# Allegro board XS6-8.brd
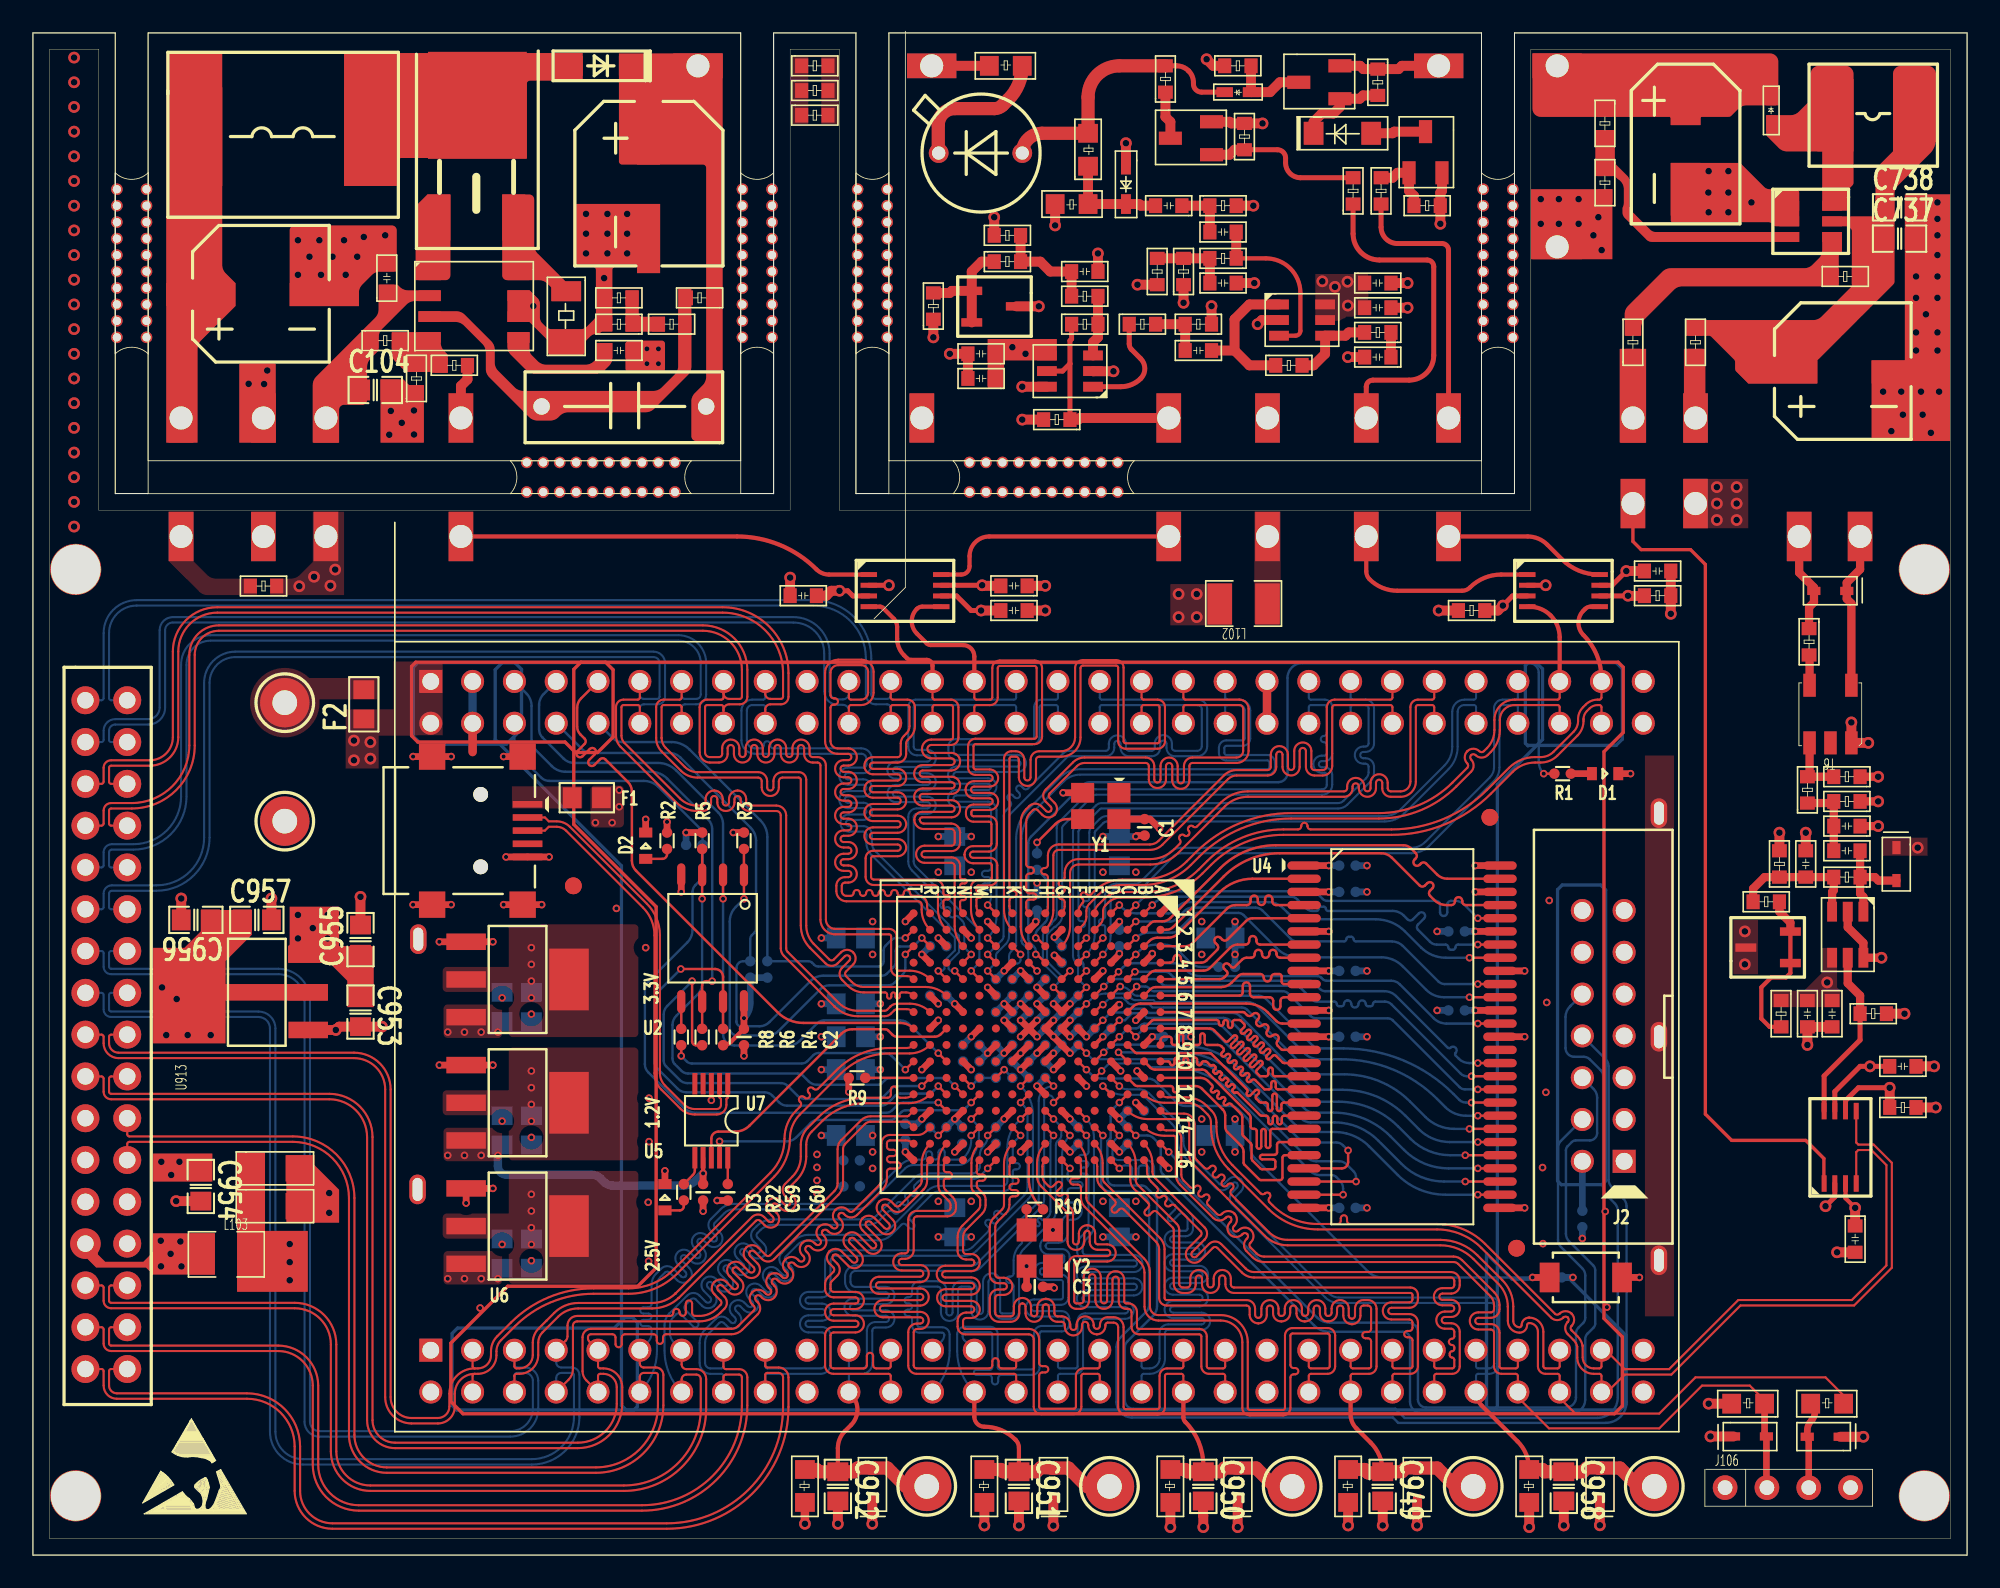
[diagram p0: board, top side]
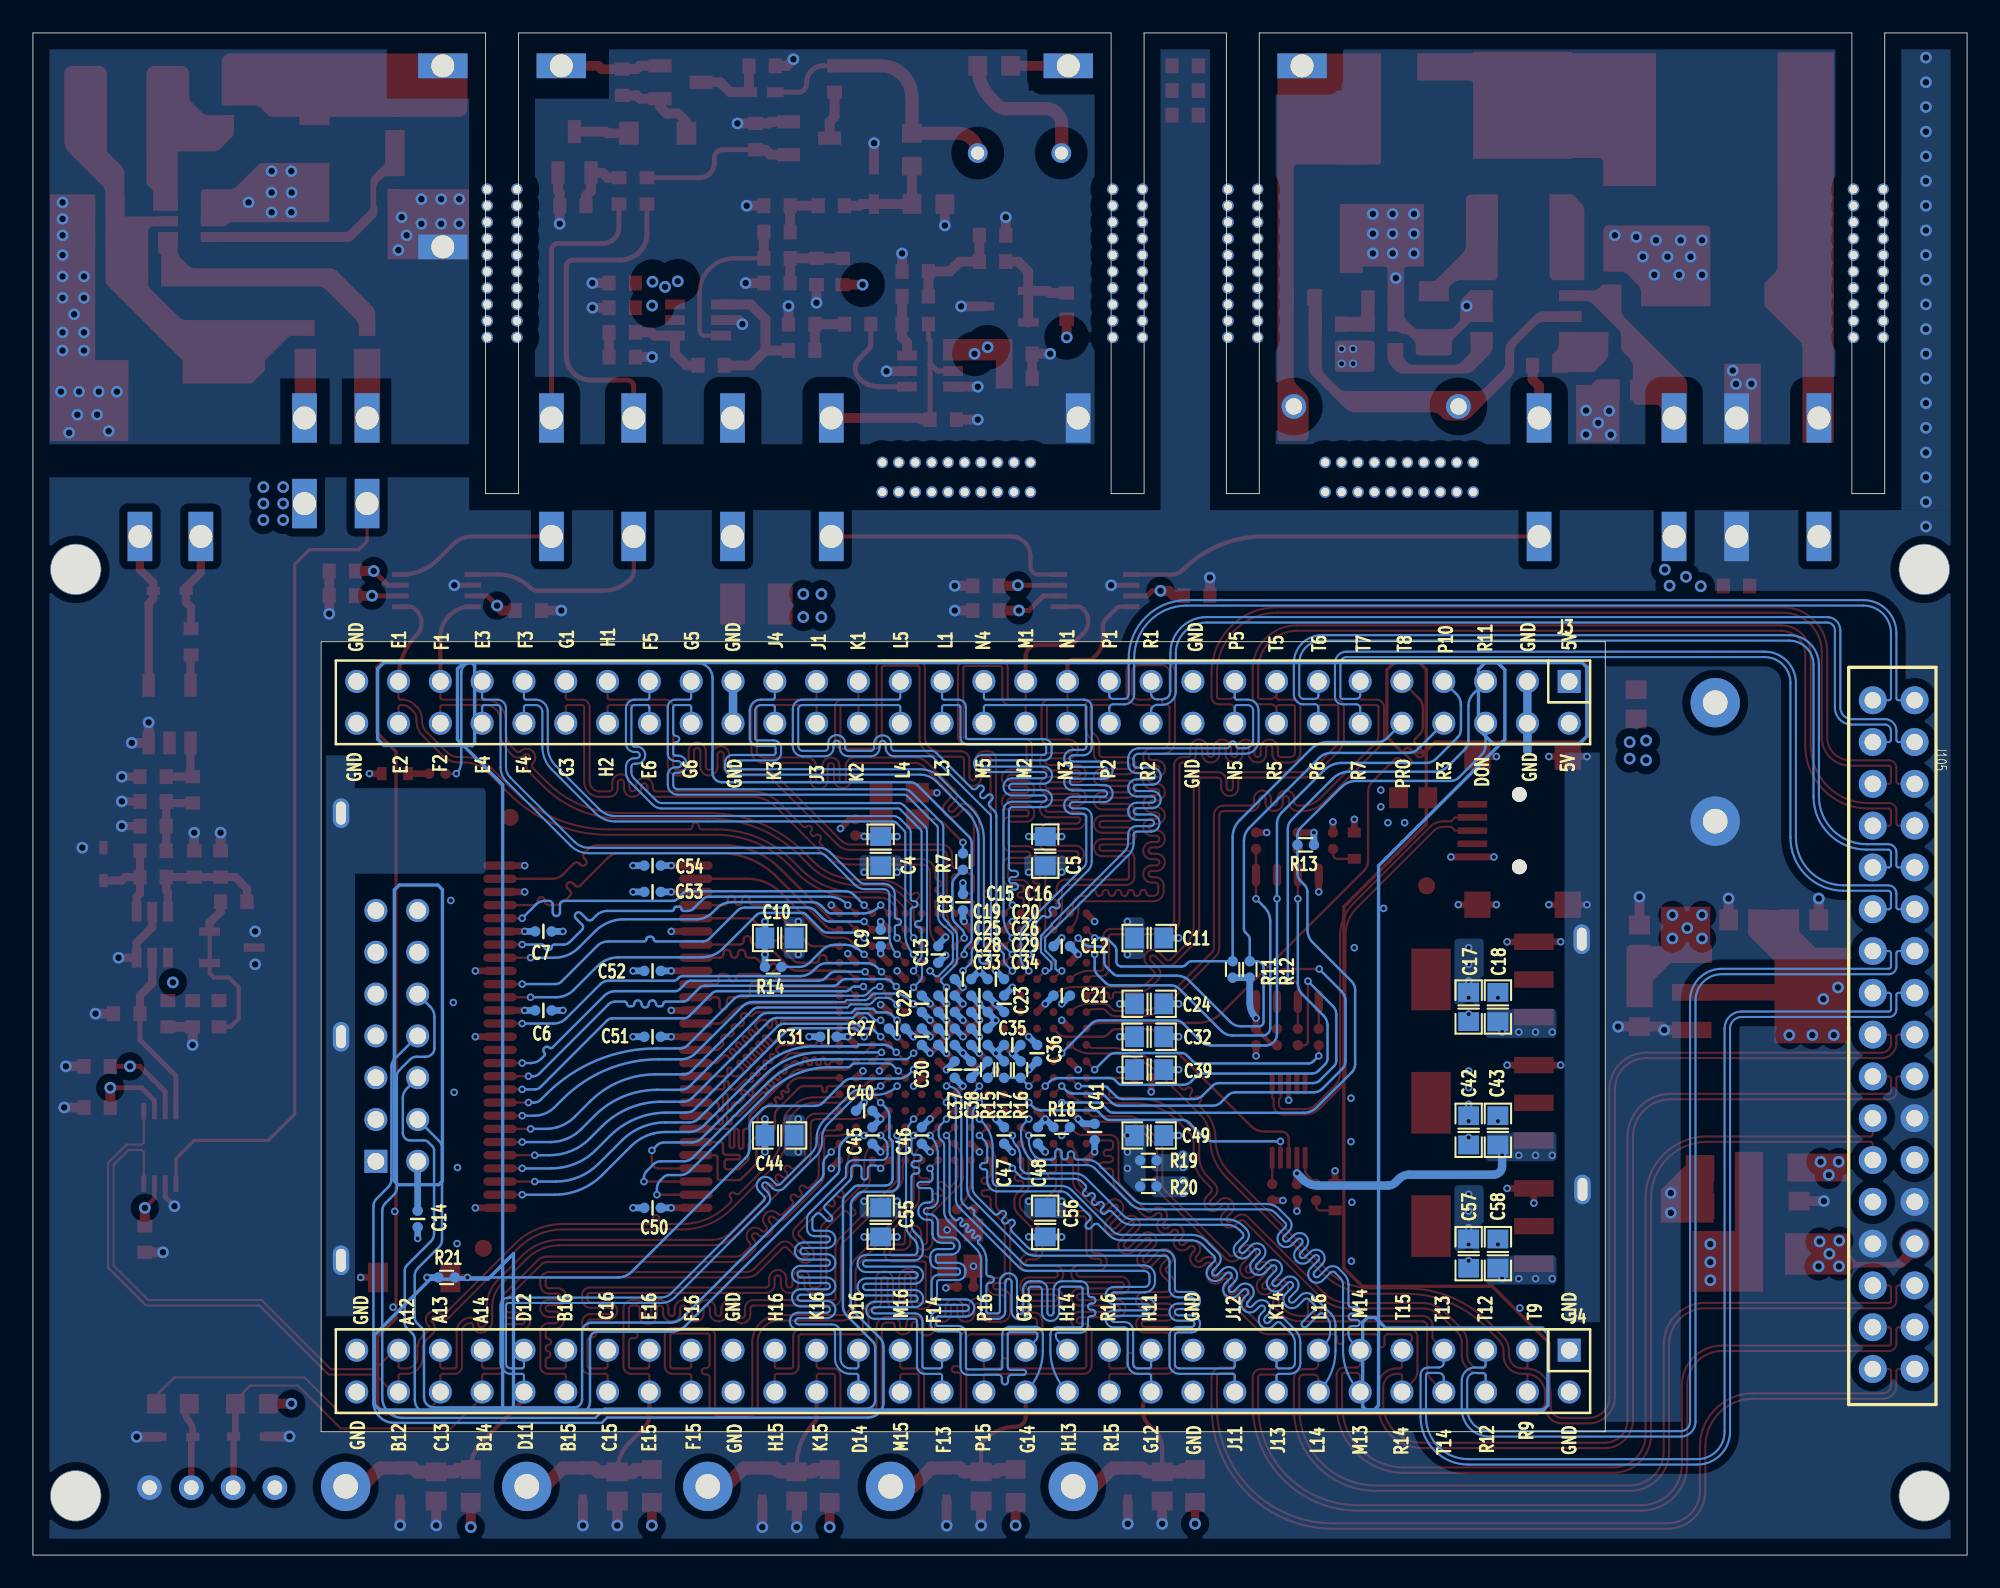
[diagram p1: board, bottom side, seen from below]

Outline 117.5 x 92.5 mm; copper layers: TOP, L2_GND, L3_P, BOTTOM. Coordinates in mm from the lower left corner of the outline.
Outline path: 0,92.5 0,0 117.5,0 117.5,92.5 90,92.5 90,64.5 88,64.5 88,92.5 52,92.5 52,64.5 50,64.5 50,92.5 45,92.5 45,64.5 43,64.5 43,92.5 7,92.5 7,64.5 5,64.5 5,92.5 0,92.5

## Design rules (mm)
constraint set DEFAULT: min track width 0.147, pair gap 0.102
net group DP_L34_3: nets EN_HVPS_IO N3_L34P_3
net group DP_USB: nets USB_DM USB_DP
net group NG_SDRAM_D8-15: nets SDRAM_DQ8 SDRAM_DQ9 SDRAM_DQ10 SDRAM_DQ11 SDRAM_DQ12 SDRAM_DQ13 SDRAM_DQ14 SDRAM_DQ15 SDRAM_UDQM

## Placement (name value [footprint] x y rotation side)
C1  100nF  [C0402]  67.54 44.22 270 top
C2  100nF  [C0402]  43.2 31.48 270 top
C3  100nF  [C0402]  60.86 16.31 0 top
C4  10uF  [C0805]  66 42.78 90 bottom
C5  10uF  [C0805]  56 42.78 90 bottom
C6  100nF  [C0402]  86.49 33.1 180 bottom
C7  100nF  [C0402]  86.49 37.9 180 bottom
C8  100nF  [C0402]  61 39.67 90 bottom
C9  100nF  [C0402]  66 37.5 270 bottom
C10  10uF  [C0805]  72.14 37.5 0 bottom
C11  10uF  [C0805]  49.69 37.5 180 bottom
C12  100nF  [C0402]  55 37 0 bottom
C13  100nF  [C0402]  62.5 36.5 90 bottom
C14  100nF  [C0402]  94.13 20.43 270 bottom
C15  100nF  [C0402]  61 35 180 bottom
C16  100nF  [C0402]  59 35 0 bottom
C17  22uF/6.3V  [C0805]  30.28 33.31 270 bottom
C18  10uF/10V  [C0805]  28.5 33.31 90 bottom
C19  100nF  [C0402]  62 34 180 bottom
C20  100nF  [C0402]  60 34 180 bottom
C21  100nF  [C0402]  55 34 180 bottom
C22  100nF  [C0402]  63.5 33.5 270 bottom
C23  100nF  [C0402]  58.5 33.5 270 bottom
C24  10uF  [C0805]  49.69 33.5 180 bottom
C25  100nF  [C0402]  62 33 180 bottom
C26  100nF  [C0402]  60 33 0 bottom
C27  100nF  [C0402]  65 32 0 bottom
C28  100nF  [C0402]  62 32 180 bottom
C29  100nF  [C0402]  60 32 0 bottom
C30  100nF  [C0402]  63.5 31.5 90 bottom
C31  100nF  [C0402]  69.17 31.5 0 bottom
C32  10uF  [C0805]  49.69 31.5 180 bottom
C33  100nF  [C0402]  62 31 180 bottom
C34  100nF  [C0402]  60 31 180 bottom
C35  100nF  [C0402]  58 31 0 bottom
C36  100nF  [C0402]  56.5 30.5 90 bottom
C37  100nF  [C0402]  61.5 29.5 270 bottom
C38  100nF  [C0402]  60.5 29.5 90 bottom
C39  10uF  [C0805]  49.69 29.5 180 bottom
C40  100nF  [C0402]  67 27 180 bottom
C41  100nF  [C0402]  53 25.71 270 bottom
C42  22uF/6.3V  [C0805]  30.28 25.81 270 bottom
C43  10uF/10V  [C0805]  28.5 25.81 90 bottom
C44  10uF  [C0805]  72.14 25.5 0 bottom
C45  100nF  [C0402]  66.5 25.5 90 bottom
C46  100nF  [C0402]  63.5 25.5 270 bottom
C47  100nF  [C0402]  58.5 25.5 270 bottom
C48  100nF  [C0402]  56.45 25.5 90 bottom
C49  10uF  [C0805]  49.69 25.5 180 bottom
C50  100nF  [C0402]  79.86 21.1 0 bottom
C51  100nF  [C0402]  79.86 31.5 0 bottom
C52  100nF  [C0402]  79.86 35.5 0 bottom
C53  100nF  [C0402]  79.86 40.3 0 bottom
C54  100nF  [C0402]  79.86 41.9 0 bottom
C55  10uF  [C0805]  66 20.22 270 bottom
C56  10uF  [C0805]  56 20.22 270 bottom
C57  22uF/6.3V  [C0805]  30.28 18.32 270 bottom
C58  10uF/10V  [C0805]  28.5 18.32 90 bottom
C59  100nF  [C0402]  40.71 22.05 270 top
C60  100nF  [C0402]  42.21 22.05 270 top
C102  0.1uF/35V  [C0603]  21.5 76.8 90 top
C103  220uF/35V  [CAP-SMD-D8D0-L8D3-W8D3-P7D5]  10.2 76.6 0 top
C104  10uF/35V  [C0805]  20.8 70.8 0 top
C205  0.1uF/35V  [C0603]  34.8 73.2 0 top
C401  4.7uF/400V  [CAP-SMD-D8D0-L10D3-B8D3]  37.4 86.6 270 top
C602  0.1uF/400V  [CAP-THR-L11D4-W3D8-P10D0-D0D8]  40.9 69.8 180 top
C639  0.1uF/16V  [C0603]  58.8 57.4 0 top
C640  0.1uF/16V  [C0603]  60.4 58.9 180 top
C715  100uF/35V  [CAP-SMD-L6D6-W6D6-P5D5-MM]  100.4 88.5 270 top
C737  10uF/35V  [C0805]  113.4 80 0 top
C738  10uF/35V  [C0805]  113.4 81.9 0 top
C739  220uF/35V  [CAP-SMD-D8D0-L8D3-W8D3-P7D5]  106.3 71.9 0 top
C930  0.1uF/16V  [C0603]  69.8 82 180 top
C934  10uF/16V  [C0603]  58.4 73 180 top
C935  0.1uF/16V  [C0603]  58.4 71.5 180 top
C936  0.1uF/16V  [C0603]  63.1 78 0 top
C941  10uF/16V  [C0603]  80.9 77.3 0 top
C942  0.1uF/16V  [C0603]  80.9 75.8 0 top
C943  0.1uF/16V  [C0603]  73.1 80.4 180 top
C944  0.1uF/16V  [C0603]  71.5 77.3 0 top
C945  0.1uF/16V  [C0603]  82.5 72.8 180 top
C946  0.1uF/16V  [C0603]  70 73.2 0 top
C947  0.1uF/16V  [C0603]  99.5 59.8 180 top
C948  0.1uF/16V  [C0603]  47.6 58.3 180 top
C949  0.1uF/16V  [C0805]  82 4.18 270 top
C950  0.1uF/16V  [C0805]  71.1 4.18 270 top
C951  0.1uF/16V  [C0805]  59.9 4.18 270 top
C952  0.1uF/16V  [C0805]  48.9 4.18 270 top
C953  10uF/10V  [C0805]  19.9 33 270 top
C954  22uF/6.3V  [C0805]  10.2 22.4 270 top
C955  10uF/10V  [C0805]  19.9 37.4 90 top
C956  22uF/6.3V  [C0805]  9.9 38.6 180 top
C957  22uF/6.3V  [C0805]  13.6 38.6 0 top
C958  0.1uF/16V  [C0805]  93 4.18 270 top
C961  10uF/16V  [C0603]  107.8 32.1 90 top
C962  0.1uF/16V  [C0603]  109.3 32.1 90 top
C963  0.1uF/16V  [C0603]  111 44.3 180 top
C964  0.1uF/16V  [C0603]  111 42.8 180 top
C965  0.1uF/16V  [C0603]  107.7 41.2 90 top
C966  0.1uF/16V  [C0603]  114.4 29.7 180 top
C967  0.1uF/16V  [C0603]  110.7 20 270 top
C968  47uF/10V  [C1206]  13.1 20.4 0 top
C969  47uF/10V  [C1206]  13.1 22.7 0 top
D1  GREEN  [Q0603]  95.51 47.49 0 top
D2  GREEN  [Q0603]  37.23 43.11 90 top
D3  GREEN  [Q0603]  38.39 21.75 90 top
D12  PTVSLC3D3V3B  [SOD-323]  51 4.28 90 top
D13  PTVSLC3D3V3B  [SOD-323]  62 4.28 90 top
D14  PTVSLC3D3V3B  [SOD-323]  73.2 4.28 90 top
D15  PTVSLC3D3V3B  [SOD-323]  84.1 4.28 90 top
D77  BAS521-7  [SOD-523-L1D2-W0D8-P1D6-MM]  105.6 88.6 270 top
D92  PTVSLC3D3V3B  [SOD323-L1D8-W1D3-P2D4-MM]  66.4 84.5 270 top
D94  SAPD  [SAPD-THR-2P]  57.6 85.2 180 top
D201  E1G  [SOD-123FL]  36.3 90.5 180 top
D611  MMSZ12T1G  [SOD-123-L2D8-W1D8-P3D5-MM]  77.8 86.4 0 top
D812  BAS521-7  [SOD-523-L1D2-W0D8-P1D6-MM]  72.4 88.9 0 top
D813  PTVSLC3D3V3B  [SOD-323]  95.2 4.28 90 top
D814  PTVSLC3D3V3B  [SOD-323]  113.2 42 270 top
D815  PTVSLC3D5VB  [SOD-323]  109.2 58.6 180 top
D816  PTVSLC3D3V3B  [SOD-323]  104.3 7.2 0 top
D817  PTVSLC3D3V3B  [SOD-323]  108.8 7.2 180 top
F1  400mA  [F0805]  33.65 46.02 0 top
F2  400mA  [F0805]  20.1 51.7 90 top
J1  MINI USB  [MINIUSB-AB-SM]  21.3 44.02 270 top
J2  CONN RCPT 7x2  [DIP2X7_2P54]  96.67 23.93 90 top
J3  CONN PLUG 30x2  [DIP2X30_2P54]  24.17 53.09 0 bottom
J4  CONN PLUG 30x2  [DIP2X30_2P54]  24.17 12.45 0 bottom
J105  Header-17x2  [DIP-17X2-2D54MM]  3.19 51.95 270 bottom
J106  Header1x4  [SIP-4-2D54MM]  102.8 4.1 0 top
L74  47uH/1A  [IND-SMD-L5D0-W5D0-P4D6-MM]  114.1 87.5 180 top
L101  100uH/2A  [IND-SMD-L11D5-W10D0-P10D4]  10 86.2 0 top
L102  10uH/300mA  [L1210]  75.1 59.1 180 top
L103  10uH/300mA  [L1210]  10.2 17 0 top
NOREF  -  []  15.3 72.5 90 top
NOREF#2  -  []  60.99 7.5 90 top
NOREF#3  -  [unnamed#2]  51 83 270 top
NOREF#4  -  [unnamed#2]  30 65.5 0 top
NOREF#5  -  []  24.66 81.28 0 top
NOREF#6  -  []  10.2 76.6 0 top
NOREF#7  -  []  105.8 70.05 0 top
NOREF#8  -  [unnamed#3]  88.51 44.84 0 top
NOREF#9  -  []  24.66 81.28 0 top
NOREF#10  -  [unnamed#2]  44 83 270 top
NOREF#11  -  [unnamed#2]  89 83 270 top
NOREF#12  -  [unnamed#4]  114.9 59.9 0 top
NOREF#13  -  []  9.7 74.75 0 top
NOREF#14  -  []  32.7 90.5 0 top
NOREF#15  -  []  33.55 75.17 90 top
NOREF#16  -  []  7 92.5 0 top
NOREF#17  -  []  111.4 67.8 90 top
NOREF#18  -  [unnamed#4]  114.9 3.6 0 top
NOREF#19  -  []  32.4 73.8 90 top
NOREF#20  -  []  -0.4 -0.01 90 top
NOREF#21  -  []  97.83 12.45 90 top
NOREF#22  -  [unnamed#4]  2.6 3.6 0 top
NOREF#23  -  [unnamed#3]  90.13 18.65 0 top
NOREF#24  -  [unnamed#2]  56.9 65.5 0 top
NOREF#25  -  []  35.7 84.9 0 top
NOREF#26  -  []  106.3 71.9 0 top
NOREF#27  -  []  40.8 82.1 90 top
NOREF#28  -  []  32.4 72.9 90 top
NOREF#29  -  []  37.4 80 90 top
NOREF#30  -  [unnamed#2]  6 83 270 top
NOREF#31  -  [unnamed#4]  2.6 59.9 0 top
NOREF#32  -  [unnamed#3]  32.83 40.67 0 top
NOREF#33  -  []  152.35 60.76 180 bottom
Q45  FH3400C  [SOT-23-3-L2D9-W1D3-P1D9-MM]  85.6 84 270 top
Q83  FH3400C  [SOT-23-3-L2D9-W1D3-P1D9-MM]  71.6 87.1 0 top
Q89  AO3401A  [SOT-23-3-L2D9-W1D3-P1D9-MM]  79.4 90.5 0 top
Q201  AOD458  [TO-252-2-DPAK]  27 88.1 90 top
R1  1K  [R0402]  92.93 47.49 180 top
R2  680R  [R0402]  38.52 43.41 270 top
R3  2.4K  [R0402]  43.2 43.41 90 top
R4  4.7K  [R0402]  41.93 31.48 270 top
R5  4.7K  [R0402]  40.66 43.41 90 top
R6  33R  [R0402]  40.66 31.48 90 top
R7  33R  [R0402]  61 42.14 90 bottom
R8  33R  [R0402]  39.39 31.48 90 top
R9  1K  [R0402]  50.06 29 180 top
R10  33R  [R0402]  60.86 21.01 180 top
R11  4.7K  [R0402]  44.62 35.59 270 bottom
R12  4.7K  [R0402]  43.58 35.59 270 bottom
R13  330R  [R0402]  40.18 43.16 180 bottom
R14  100R  [R0402]  72.53 35.74 0 bottom
R15  4.7K  [R0402]  59.5 29.5 90 bottom
R16  1K/NC  [R0402]  57.5 29.5 90 bottom
R17  1K  [R0402]  58.5 29.5 270 bottom
R18  4.7K  [R0402]  55 26 180 bottom
R19  0R/NC  [R0402]  49.74 23.99 180 bottom
R20  0R  [R0402]  49.74 22.41 180 bottom
R21  1K  [R0402]  92.37 16.87 180 bottom
R22  680R  [R0402]  39.54 22.05 270 top
R51  10K  [R0805]  79.9 5.2 270 top
R52  10K  [R0805]  69.1 5.2 270 top
R53  10K  [R0805]  57.8 5.2 270 top
R54  10K  [R0805]  46.9 5.2 270 top
R105  50mR  [R1206]  32.4 76.8 270 top
R172  0  [R0603]  46.7 90.5 0 top
R204  0  [R0603]  39.6 74.8 180 top
R206  DNP  [R0603]  20.6 73.8 0 top
R207  0  [R0603]  23.3 70.7 90 top
R209  DNP  [R0603]  26.4 72.3 180 top
R264  1K  [R0603]  88.2 57.4 180 top
R302  DNP  [R0603]  36.4 76.4 180 top
R303  10K  [R0603]  36.4 74.8 180 top
R305  1.5M  [R0603]  41.3 76.4 180 top
R306  0  [R0603]  14.81 58.89 180 top
R326  1K  [R0603]  83.9 82 0 top
R528  100  [R0603]  81.9 82.1 90 top
R733  182K  [R0603]  95.5 87.8 270 top
R735  10K  [R0603]  95.5 84.2 270 top
R736  0  [R0603]  97.2 72.9 90 top
R740  10K  [R0603]  110.9 77.7 180 top
R741  0  [R0603]  101 72.9 90 top
R812  0  [R0603]  68.8 88.9 90 top
R818  1M  [R0603]  72.4 90.5 0 top
R822  1K  [R0603]  81.7 90.3 270 top
R842  100  [R0603]  80.2 82.1 90 top
R843  1K  [R0603]  73.6 85.4 90 top
R910  682  [R0603]  60 80.2 180 top
R911  332K  [R0805]  64.1 84.4 90 top
R916  10K  [R0603]  63 69 180 top
R941  100K  [R0805]  62.1 82.1 0 top
R956  100K  [R0603]  71.5 82 0 top
R957  4.99K  [R0603]  58.4 78.6 0 top
R960  499  [R0603]  54.7 75.1 90 top
R961  0  [R0603]  66.6 74.8 0 top
R962  10K  [R0603]  63.1 74.8 0 top
R963  1K  [R0603]  64.7 76.5 180 top
R965  4.99K  [R0603]  68.3 78.8 270 top
R966  4.99K  [R0603]  69.9 77.2 90 top
R967  100K  [R0603]  73.1 78.8 180 top
R968  4.99K  [R0603]  75.5 72.3 0 top
R969  100K  [R0603]  82.5 74.3 180 top
R970  100K  [R0603]  71.6 74.8 180 top
R971  0  [R0805]  60.1 90.5 180 top
R972  0  [R0603]  46.7 89 0 top
R973  0  [R0603]  46.7 87.5 0 top
R974  1K  [R0603]  97.9 58.3 0 top
R975  10K  [R0805]  90.9 5.2 270 top
R976  0  [R0603]  107.9 56.3 270 top
R977  50  [R0603]  111 47.3 180 top
R979  0  [R0603]  107.8 45.7 90 top
R980  10K  [R0603]  111 32.9 0 top
R982  682  [R0603]  106.1 41.2 90 top
R983  4.99K  [R0603]  106.1 39.7 180 top
R984  499  [R0603]  106.2 33.7 270 top
R985  10K  [R0603]  111 41.2 180 top
R986  DNP  [R0603]  111 45.8 180 top
R987  1K  [R0603]  112.8 27.2 0 top
R988  10K  [R0805]  105.2 9.2 180 top
R989  1K  [R0805]  110 9.2 180 top
S1  FSMRA2JH  [SMD_3X4X2MM]  94.34 16.87 0 top
T1  TPAD_015  [TP_OBL1_4X0_6]  98.78 45.08 90 top
T2  TPAD_015  [TP_OBL1_4X0_6]  23.41 37.43 90 top
T3  TPAD_015  [TP_OBL1_4X0_6]  98.78 31.5 90 top
T4  TPAD_015  [TP_OBL1_4X0_6]  23.37 22.22 90 top
T5  TPAD_015  [TP_OBL1_4X0_6]  98.78 17.91 90 top
T6  ETC1-1T-2TR  [SM-22]  111.1 53 180 top
TP2  T POINT F  [STAMP_HOLE_1D5X3D0_1D4]  40.4 90.5 270 top
TP3  T POINT F  [STAMP_HOLE_1D5X3D0_1D4]  9 69.1 180 top
TP4  T POINT F  [STAMP_HOLE_1D5X3D0_1D4]  14 69.1 180 top
TP5  T POINT F  [STAMP_HOLE_1D5X3D0_1D4]  17.8 69.1 180 top
TP6  T POINT F  [STAMP_HOLE_1D5X3D0_1D4]  26 69.1 180 top
TP7  T POINT F  [STAMP_HOLE_1D5X3D0_1D4]  9 61.9 0 top
TP8  T POINT F  [STAMP_HOLE_1D5X3D0_1D4]  17.8 61.9 0 top
TP9  T POINT F  [STAMP_HOLE_1D5X3D0_1D4]  26 61.9 0 top
TP10  T POINT F  [STAMP_HOLE_1D5X3D0_1D4]  14 61.9 0 top
TP11  T POINT F  [STAMP_HOLE_1D5X3D0_1D4]  54.6 90.5 90 top
TP16  QUENCH  [STAMP_HOLE_1D5X3D0_1D4]  86 69.1 180 top
TP25  RESET  [STAMP_HOLE_1D5X3D0_1D4]  81 69.1 180 top
TP26  GND  [TP_THR_CIR_3D0_1D5]  65.4 4.18 0 top
TP27  GND  [TP_THR_CIR_3D0_1D5]  76.5 4.18 0 top
TP28  GND  [TP_THR_CIR_3D0_1D5]  87.5 4.18 0 top
TP32  T POINT F  [STAMP_HOLE_1D5X3D0_1D4]  101 69.1 180 top
TP33  T POINT F  [STAMP_HOLE_1D5X3D0_1D4]  97.2 69.1 180 top
TP34  T POINT F  [STAMP_HOLE_1D5X3D0_1D4]  92.6 79.5 90 top
TP35  T POINT F  [STAMP_HOLE_1D5X3D0_1D4]  92.6 90.5 90 top
TP37  T POINT F  [STAMP_HOLE_1D5X3D0_1D4]  54 69.1 180 top
TP38  PULSE  [STAMP_HOLE_1D5X3D0_1D4]  69 69.1 180 top
TP39  T POINT F  [STAMP_HOLE_1D5X3D0_1D4]  85.4 90.5 270 top
TP40  QUENCH  [STAMP_HOLE_1D5X3D0_1D4]  69 61.9 0 top
TP41  QUENCH  [STAMP_HOLE_1D5X3D0_1D4]  81 61.9 0 top
TP42  QUENCH  [STAMP_HOLE_1D5X3D0_1D4]  86 61.9 0 top
TP43  T POINT F  [STAMP_HOLE_1D5X3D0_1D4]  75 69.1 180 top
TP44  T POINT F  [STAMP_HOLE_1D5X3D0_1D4]  75 61.9 0 top
TP45  GND  [TP_THR_CIR_3D0_1D5]  54.3 4.18 0 top
TP46  GND  [TP_THR_CIR_3D0_1D5]  98.5 4.18 0 top
TP47  T POINT F  [STAMP_HOLE_1D5X3D0_1D4]  101 63.9 0 top
TP48  T POINT F  [STAMP_HOLE_1D5X3D0_1D4]  97.2 63.9 0 top
TP49  T POINT F  [STAMP_HOLE_1D5X3D0_1D4]  107.3 61.9 0 top
TP50  T POINT F  [STAMP_HOLE_1D5X3D0_1D4]  111 61.9 0 top
TP51  GND  [TP_THR_CIR_3D0_1D5]  15.3 51.8 0 top
TP52  GND  [TP_THR_CIR_3D0_1D5]  15.3 44.6 0 top
U1  W25Q16FVSIG  [SOIC8_1P27_208MIL]  41.29 37.48 270 top
U2  AMS1117-3.3  [SOT-223]  29.44 34.98 270 top
U3  xc6slx25ftg256  [FTG256]  61 31.5 270 top
U4  W9812G6KH-6  [TSOP54-400]  77.22 41.9 270 top
U5  AMS1117-1.2  [SOT-223]  29.44 27.49 270 top
U6  AMS1117-2.5  [SOT-223]  29.44 19.99 270 top
U7  CH340E  [MSOP10]  41.21 26.39 270 top
U75  MAX5026EUT-T  [SOT23-6]  108 81.1 270 top
U92  TLV3501AIDBVR  [SOT-23-6-L2D9-W1D6-PD0D95-CD2D8-MM]  64.4 71 180 top
U98  TL431  [SOT-23-3-TL431]  56.6 77.3 270 top
U101  MAX1771ESA+  [SO-8]  29.5 77.8 270 top
U910  OPA357AIDBVR  [SOT-23-6-L2D9-W1D6-PD0D95-CD2D8-MM]  75.7 76 0 top
U911  TXS0102DCUR  [VSSOP-8]  93 58.6 270 top
U912  TXS0102DCUR  [VSSOP-8]  53 58.6 270 top
U913  AMS1117-3.3  [SOT-223]  13.6 34.2 90 top
U914  TLV3501AIDBVR  [SOT-23-6-L2D9-W1D6-PD0D95-CD2D8-MM]  111.2 39.1 270 top
U915  TL431  [SOT-23-3-TL431]  107.2 35.5 90 top
U916  TXS0102DCUR  [VSSOP-8]  109.8 24.8 0 top
Y1  50MHz  [OSC3225]  64.87 45.52 180 top
Y2  TBD  [OSC3225]  61.16 18.66 90 top

## Library data of the parts
C1 C3 = CAP_0: room: PHY&FPGA
C2 C4-C60 C953-C957 = CAP_NP
C102 C104 C205 C639 C640 C737 C738 C930 C934-C936 C941-C952 C958 C961-C969 = CAP NP
C103 C401 C602 C715 C739 = C
D1-D3 = LED: room: POWER
D12-D15 D92 D813-D817 = DIODE SCHOTTKY
D77 D94 D201 D812 = DIODE
D611 = DIODE ZENER
F1 F2 = FUSE
J1 = USB_MINI_AB_RECEPTACLE: Tolerance: #TOL; User Part Number: HAMP
J2 = CONN RCPT 7x2/SM_1
J3 J4 = CONN PLUG 30x2
J105 = Header-17x2
J106 = Header1x4
L74 L101-L103 = INDUCTOR
Q45 Q83 = FH3400C
Q89 = BSP316P_0
Q201 = IRF644PbF
R1-R22 = SMALL R1
R51-R54 R105 R172 R204 R206 R207 R209 R264 R302 R303 R305 R306 R326 R528 R733 R735 R736 R740 R741 R812 R818 R822 R842 R843 R910 R911 R916 R941 R956 R957 R960-R963 R965-R977 R979 R980 R982-R989 = R
S1 = SWITCH_2: User Part Number: partnum; Tolerance: RichardLC; room: CPU
T1-T5 = TESTLOOP
T6 = ETC1-1T-2TR
TP2-TP11 TP16 TP25-TP28 TP32-TP35 TP37-TP52 = T POINT F
U1 = EPCS1SI8N_0
U2 U5 U6 U913 = AMS1117
U3 = xc6slx25ftg256
U4 = K4S561632C-TC75_0
U7 = CH340E
U75 = MAX5026EUT-T
U92 U914 = TLV3501AIDBVR
U98 U915 = TL431/TI
U101 = MAX1771ESA+
U910 = OPA357AIDBVR
U911 U912 U916 = TXS0102DCUR
Y1 Y2 = OSCILLATOR_0: room: PHY&FPGA

## Footprints (pads in the part's own frame, mm; a bottom-side part is the same pattern mirrored in y, then rotated)
C0402
  round 0.635 smd: 1(-0.5,0) 2(0.5,0)
C0603
  rect 0.8x0.9 smd: 1(0,0) 2(1.6,0)
C0805
  rect 1.141x1.27 smd: 1(-0.889,0) 2(0.889,0)
C1206
  rect 1.5x1.6 smd: 1(0.2,0.8) 2(3,0.8)
CAP-SMD-D8D0-L8D3-W8D3-P7D5
  rect 4.2x1.4 smd: 1(0,0) 2(7.5,0)
CAP-SMD-D8D0-L10D3-B8D3
  rect 4.2x1.4 smd: 1(0,0) 2(6.6,0)
CAP-SMD-L6D6-W6D6-P5D5-MM
  rect 3.2x1.8 smd: 1(0,0) 2(5.5,0)
CAP-THR-L11D4-W3D8-P10D0-D0D8
  round 1.5 hole 1: 1(0,0) 2(10,0)
DIP2X7_2P54
  rect 1.399x1.399 hole 1.021: 1(0,0)
  round 1.399 hole 1.021: 2(0,2.54) 3(2.54,0) 4(2.54,2.54) 5(5.08,0) 6(5.08,2.54) 7(7.62,0) 8(7.62,2.54) 9(10.16,0) 10(10.16,2.54) 11(12.7,0) 12(12.7,2.54) 13(15.24,0) 14(15.24,2.54)
DIP2X30_2P54
  rect 1.399x1.399 hole 1.021: 1(0,0)
  round 1.399 hole 1.021: 2(0,2.54) 3(2.54,0) 4(2.54,2.54) 5(5.08,0) 6(5.08,2.54) 7(7.62,0) 8(7.62,2.54) 9(10.16,0) 10(10.16,2.54) 11(12.7,0) 12(12.7,2.54) 13(15.24,0) 14(15.24,2.54) 15(17.78,0) 16(17.78,2.54) 17(20.32,0) 18(20.32,2.54) 19(22.86,0) 20(22.86,2.54) 21(25.4,0) 22(25.4,2.54) 23(27.94,0) 24(27.94,2.54) 25(30.48,0) 26(30.48,2.54) 27(33.02,0) 28(33.02,2.54) 29(35.56,0) 30(35.56,2.54) 31(38.1,0) 32(38.1,2.54) 33(40.64,0) 34(40.64,2.54) 35(43.18,0) 36(43.18,2.54) 37(45.72,0) 38(45.72,2.54) 39(48.26,0) 40(48.26,2.54) 41(50.8,0) 42(50.8,2.54) 43(53.34,0) 44(53.34,2.54) 45(55.88,0) 46(55.88,2.54) 47(58.42,0) 48(58.42,2.54) 49(60.96,0) 50(60.96,2.54) 51(63.5,0) 52(63.5,2.54) 53(66.04,0) 54(66.04,2.54) 55(68.58,0) 56(68.58,2.54) 57(71.12,0) 58(71.12,2.54) 59(73.66,0) 60(73.66,2.54)
DIP-17X2-2D54MM
  round 1.7 hole 1: 1(0,-2.54) 2(0,0) 3(2.54,-2.54) 4(2.54,0) 5(5.08,-2.54) 6(5.08,0) 7(7.62,-2.54) 8(7.62,0) 9(10.16,-2.54) 10(10.16,0) 11(12.7,-2.54) 12(12.7,0) 13(15.24,-2.54) 14(15.24,0) 15(17.78,-2.54) 16(17.78,0) 17(20.32,-2.54) 18(20.32,0) 19(22.86,-2.54) 20(22.86,0) 21(25.4,-2.54) 22(25.4,0) 23(27.94,-2.54) 24(27.94,0) 25(30.48,-2.54) 26(30.48,0) 27(33.02,-2.54) 28(33.02,0) 29(35.56,-2.54) 30(35.56,0) 31(38.1,-2.54) 32(38.1,0) 33(40.64,-2.54) 34(40.64,0)
F0805
  rect 1.141x1.27 smd: 1(-0.889,0) 2(0.889,0)
FTG256
  round 0.483 smd: A1(-7.5,7.5) A2(-6.5,7.5) A3(-5.5,7.5) A4(-4.5,7.5) A5(-3.5,7.5) A6(-2.5,7.5) A7(-1.5,7.5) A8(-0.5,7.5) A9(0.5,7.5) A10(1.5,7.5) A11(2.5,7.5) A12(3.5,7.5) A13(4.5,7.5) A14(5.5,7.5) A15(6.5,7.5) A16(7.5,7.5) B1(-7.5,6.5) B2(-6.5,6.5) B3(-5.5,6.5) B4(-4.5,6.5) B5(-3.5,6.5) B6(-2.5,6.5) B7(-1.5,6.5) B8(-0.5,6.5) B9(0.5,6.5) B10(1.5,6.5) B11(2.5,6.5) B12(3.5,6.5) B13(4.5,6.5) B14(5.5,6.5) B15(6.5,6.5) B16(7.5,6.5) C1(-7.5,5.5) C2(-6.5,5.5) C3(-5.5,5.5) C4(-4.5,5.5) C5(-3.5,5.5) C6(-2.5,5.5) C7(-1.5,5.5) C8(-0.5,5.5) C9(0.5,5.5) C10(1.5,5.5) C11(2.5,5.5) C12(3.5,5.5) C13(4.5,5.5) C14(5.5,5.5) C15(6.5,5.5) C16(7.5,5.5) D1(-7.5,4.5) D2(-6.5,4.5) D3(-5.5,4.5) D4(-4.5,4.5) D5(-3.5,4.5) D6(-2.5,4.5) D7(-1.5,4.5) D8(-0.5,4.5) D9(0.5,4.5) D10(1.5,4.5) D11(2.5,4.5) D12(3.5,4.5) D13(4.5,4.5) D14(5.5,4.5) D15(6.5,4.5) D16(7.5,4.5) E1(-7.5,3.5) E2(-6.5,3.5) E3(-5.5,3.5) E4(-4.5,3.5) E5(-3.5,3.5) E6(-2.5,3.5) E7(-1.5,3.5) E8(-0.5,3.5) E9(0.5,3.5) E10(1.5,3.5) E11(2.5,3.5) E12(3.5,3.5) E13(4.5,3.5) E14(5.5,3.5) E15(6.5,3.5) E16(7.5,3.5) F1(-7.5,2.5) F2(-6.5,2.5) F3(-5.5,2.5) F4(-4.5,2.5) F5(-3.5,2.5) F6(-2.5,2.5) F7(-1.5,2.5) F8(-0.5,2.5) F9(0.5,2.5) F10(1.5,2.5) F11(2.5,2.5) F12(3.5,2.5) F13(4.5,2.5) F14(5.5,2.5) F15(6.5,2.5) F16(7.5,2.5) G1(-7.5,1.5) G2(-6.5,1.5) G3(-5.5,1.5) G4(-4.5,1.5) G5(-3.5,1.5) G6(-2.5,1.5) G7(-1.5,1.5) G8(-0.5,1.5) G9(0.5,1.5) G10(1.5,1.5) G11(2.5,1.5) G12(3.5,1.5) G13(4.5,1.5) G14(5.5,1.5) G15(6.5,1.5) G16(7.5,1.5) H1(-7.5,0.5) H2(-6.5,0.5) H3(-5.5,0.5) H4(-4.5,0.5) H5(-3.5,0.5) H6(-2.5,0.5) H7(-1.5,0.5) H8(-0.5,0.5) H9(0.5,0.5) H10(1.5,0.5) H11(2.5,0.5) H12(3.5,0.5) H13(4.5,0.5) H14(5.5,0.5) H15(6.5,0.5) H16(7.5,0.5) J1(-7.5,-0.5) J2(-6.5,-0.5) J3(-5.5,-0.5) J4(-4.5,-0.5) J5(-3.5,-0.5) J6(-2.5,-0.5) J7(-1.5,-0.5) J8(-0.5,-0.5) J9(0.5,-0.5) J10(1.5,-0.5) J11(2.5,-0.5) J12(3.5,-0.5) J13(4.5,-0.5) J14(5.5,-0.5) J15(6.5,-0.5) J16(7.5,-0.5) K1(-7.5,-1.5) K2(-6.5,-1.5) K3(-5.5,-1.5) K4(-4.5,-1.5) K5(-3.5,-1.5) K6(-2.5,-1.5) K7(-1.5,-1.5) K8(-0.5,-1.5) K9(0.5,-1.5) K10(1.5,-1.5) K11(2.5,-1.5) K12(3.5,-1.5) K13(4.5,-1.5) K14(5.5,-1.5) K15(6.5,-1.5) K16(7.5,-1.5) L1(-7.5,-2.5) L2(-6.5,-2.5) L3(-5.5,-2.5) L4(-4.5,-2.5) L5(-3.5,-2.5) L6(-2.5,-2.5) L7(-1.5,-2.5) L8(-0.5,-2.5) L9(0.5,-2.5) L10(1.5,-2.5) L11(2.5,-2.5) L12(3.5,-2.5) L13(4.5,-2.5) L14(5.5,-2.5) L15(6.5,-2.5) L16(7.5,-2.5) M1(-7.5,-3.5) M2(-6.5,-3.5) M3(-5.5,-3.5) M4(-4.5,-3.5) M5(-3.5,-3.5) M6(-2.5,-3.5) M7(-1.5,-3.5) M8(-0.5,-3.5) M9(0.5,-3.5) M10(1.5,-3.5) M11(2.5,-3.5) M12(3.5,-3.5) M13(4.5,-3.5) M14(5.5,-3.5) M15(6.5,-3.5) M16(7.5,-3.5) N1(-7.5,-4.5) N2(-6.5,-4.5) N3(-5.5,-4.5) N4(-4.5,-4.5) N5(-3.5,-4.5) N6(-2.5,-4.5) N7(-1.5,-4.5) N8(-0.5,-4.5) N9(0.5,-4.5) N10(1.5,-4.5) N11(2.5,-4.5) N12(3.5,-4.5) N13(4.5,-4.5) N14(5.5,-4.5) N15(6.5,-4.5) N16(7.5,-4.5) P1(-7.5,-5.5) P2(-6.5,-5.5) P3(-5.5,-5.5) P4(-4.5,-5.5) P5(-3.5,-5.5) P6(-2.5,-5.5) P7(-1.5,-5.5) P8(-0.5,-5.5) P9(0.5,-5.5) P10(1.5,-5.5) P11(2.5,-5.5) P12(3.5,-5.5) P13(4.5,-5.5) P14(5.5,-5.5) P15(6.5,-5.5) P16(7.5,-5.5) R1(-7.5,-6.5) R2(-6.5,-6.5) R3(-5.5,-6.5) R4(-4.5,-6.5) R5(-3.5,-6.5) R6(-2.5,-6.5) R7(-1.5,-6.5) R8(-0.5,-6.5) R9(0.5,-6.5) R10(1.5,-6.5) R11(2.5,-6.5) R12(3.5,-6.5) R13(4.5,-6.5) R14(5.5,-6.5) R15(6.5,-6.5) R16(7.5,-6.5) T1(-7.5,-7.5) T2(-6.5,-7.5) T3(-5.5,-7.5) T4(-4.5,-7.5) T5(-3.5,-7.5) T6(-2.5,-7.5) T7(-1.5,-7.5) T8(-0.5,-7.5) T9(0.5,-7.5) T10(1.5,-7.5) T11(2.5,-7.5) T12(3.5,-7.5) T13(4.5,-7.5) T14(5.5,-7.5) T15(6.5,-7.5) T16(7.5,-7.5)
IND-SMD-L5D0-W5D0-P4D6-MM
  rect 2.2x4.4 smd: 1(0,0) 2(4.6,0)
IND-SMD-L11D5-W10D0-P10D4
  rect 3x6 smd: 1(0,0) 2(10.4,0)
L1210
  rect 1.5x2.5 smd: 1(0.1,1.3) 2(3,1.3)
MINIUSB-AB-SM
  round 0.9 hole 0.9 unplated: (-2.2,5.9) (2.2,5.9)
  rect 0.4x1.8 smd: 1(-1.6,8.75) 2(-0.8,8.75) 3(0,8.75) 4(0.8,8.75) 5(1.6,8.75)
  rect 1.6x1.6 smd: S1(-4.5,8.45) S2(4.5,8.45) S3(-4.5,2.95) S4(4.5,2.95)
MSOP10
  rect 1.3x0.3 smd: 1(-2.25,1) 2(-2.25,0.5) 3(-2.25,0) 4(-2.25,-0.5) 5(-2.25,-1) 6(2.25,-1) 7(2.25,-0.5) 8(2.25,0) 9(2.25,0.5) 10(2.25,1)
OSC3225
  rect 1.4x1.2 smd: 1(-1.1,-0.8) 2(1.1,-0.8) 3(1.1,0.8) 4(-1.1,0.8)
Q0603
  rect 0.6x0.8 smd: 1(-0.8,0) 2(0.8,0)
R0402
  round 0.635 smd: 1(-0.5,0) 2(0.5,0)
R0603
  rect 0.8x0.9 smd: 1(0,0) 2(1.6,0)
R0805
  rect 1.14x1.2 smd: 1(0,0) 2(2,0)
R1206
  rect 1.2x1.8 smd: 1(0,0) 2(3,0)
SAPD-THR-2P
  round 1.2 hole 0.8: 1(2.576,0) 2(-2.504,0)
SIP-4-2D54MM
  round 1.5 hole 0.89: 1(0,0) 2(2.54,0) 3(5.08,0) 4(7.62,0)
SM-22
  rect 0.76x1.4 smd: 1(0.629,3.642) 2(1.899,3.642) 3(3.169,3.642) 4(3.169,0.142) 5(0.629,0.142)
SMD_3X4X2MM
  rect 1.2x1.8 smd: 1(-2.2,0) 2(2.2,0)
SO-8
  rect 0.65x1.35 smd: 1(0,-5.4) 2(1.27,-5.4) 3(2.54,-5.4) 4(3.81,-5.4) 5(3.81,0) 6(2.54,0) 7(1.27,0) 8(0,0)
SOD323-L1D8-W1D3-P2D4-MM
  rect 1.2x0.6 smd: 1(0,0) 2(2.4,0)
SOD-123-L2D8-W1D8-P3D5-MM
  rect 1.2x1.4 smd: 1(0,0) 2(3.5,0)
SOD-123FL
  rect 1.4x1.2 smd: 1(0,0) 2(3.6,0)
SOD-323
  rect 0.8x0.5 smd: 1(-0.99,0.01) 2(1.01,0.01)
SOD-523-L1D2-W0D8-P1D6-MM
  rect 1x0.6 smd: 1(0,0) 2(1.6,0)
SOIC8_1P27_208MIL
  oval 1.4x0.5 smd: 1(-3.85,1.905) 2(-3.85,0.635) 3(-3.85,-0.635) 4(-3.85,-1.905) 5(3.85,-1.905) 6(3.85,-0.635) 7(3.85,0.635) 8(3.85,1.905)
SOT23-6
  rect 0.6x1.2 smd: 1(-0.9,-1.3) 2(0.05,-1.3) 3(1,-1.3) 4(1,1.3) 5(0.05,1.3) 6(-0.9,1.3)
SOT-23-3-L2D9-W1D3-P1D9-MM
  rect 1.4x0.8 smd: 1(0,-2) 2(0,0) 3(-2.5,-1)
SOT-23-3-TL431
  rect 0.51x1.27 smd: 1(0.476,0.434) 2(1.415,3.142) 3(2.391,0.434)
SOT-23-6-L2D9-W1D6-PD0D95-CD2D8-MM
  rect 1.2x0.6 smd: 1(0,0) 2(0,-0.95) 3(0,-1.9) 4(2.8,-1.9) 5(2.8,-0.95) 6(2.8,0)
SOT-223
  rect 1x2.4 smd: 1(-2.29,-3.125) 2(0,-3.125) 3(2.29,-3.125)
  rect 3.75x2.4 smd: 4(0,3.125)
STAMP_HOLE_1D5X3D0_1D4
  rect 1.5x3 hole 1.4: 1(0,0)
TO-252-2-DPAK
  rect 2.8x1.4 smd: 1(-6.82,2.34) 3(-6.82,-2.21)
  rect 6.5x6 smd: 2(0,0)
TP_OBL1_4X0_6
  oval 1.8x1 hole 1.4x0.6: 1(0,0)
TP_THR_CIR_3D0_1D5
  round 3 hole 1.5: 1(0,0)
TSOP54-400
  oval 0.508x2.032 smd: 1(0,0) 2(0.8,0) 3(1.6,0) 4(2.4,0) 5(3.2,0) 6(4,0) 7(4.8,0) 8(5.6,0) 9(6.4,0) 10(7.2,0) 11(8,0) 12(8.8,0) 13(9.6,0) 14(10.4,0) 15(11.2,0) 16(12,0) 17(12.8,0) 18(13.6,0) 19(14.4,0) 20(15.2,0) 21(16,0) 22(16.8,0) 23(17.6,0) 24(18.4,0) 25(19.2,0) 26(20,0) 27(20.8,0) 28(20.8,11.9) 29(20,11.9) 30(19.2,11.9) 31(18.4,11.9) 32(17.6,11.9) 33(16.8,11.9) 34(16,11.9) 35(15.2,11.9) 36(14.4,11.9) 37(13.6,11.9) 38(12.8,11.9) 39(12,11.9) 40(11.2,11.9) 41(10.4,11.9) 42(9.6,11.9) 43(8.8,11.9) 44(8,11.9) 45(7.2,11.9) 46(6.4,11.9) 47(5.6,11.9) 48(4.8,11.9) 49(4,11.9) 50(3.2,11.9) 51(2.4,11.9) 52(1.6,11.9) 53(0.8,11.9) 54(0,11.9)
unnamed#2
  round 0.7 hole 0.5 unplated: (0,0.9) (0,-0.9) (1,0.9) (1,-0.9) (2,0.9) (2,-0.9) (3,0.9) (3,-0.9) (4,0.9) (4,-0.9) (5,0.9) (5,-0.9) (6,0.9) (6,-0.9) (7,0.9) (7,-0.9) (8,0.9) (8,-0.9) (9,0.9) (9,-0.9)
unnamed#3
  round 1.016 smd: (0,0) (0,0)
unnamed#4
  round 3.1 hole 3 unplated: (0,0)
VSSOP-8
  rect 0.3x1 smd: 1(-0.985,-2.22) 2(-0.335,-2.22) 3(0.315,-2.22) 4(0.965,-2.22) 5(0.965,2.18) 6(0.315,2.18) 7(-0.335,2.18) 8(-0.985,2.18)

## Nets
5V_HVPS_IN: R306.2 TP7.1(TP)
+1.2V: C19.1 C20.1 C22.1 C24.1 C25.1 C26.1 C28.1 C29.1 C30.1 C32.1 C33.1 C34.1 C39.1 C42.1 U3.G7 U3.G9 U3.H8 U3.H10 U3.J7 U3.J9 U3.K8(VCCINT#K8) U3.K10 U5.2 U5.4(VOUT1)
+2.5V: C57.1 R19.2 U6.2 U6.4(VOUT1)
+3.3V: C1.1 C2.1 C4.1 C5.1 C6.1 C7.1 C8.1 C9.1 C10.1 C11.1 C12.1 C13.1 C14.1 C15.1 C16.1 C17.1 C21.1 C23.1 C27.1 C31.1 C35.1 C36.1 C37.1 C38.1 C40.1 C44.1 C50.1 C51.1 C52.1 C53.1 C54.1 C639.1 C948.1 C967.1 J2.2(VREF) J106.1 R3.2 R4.2 R5.2 R9.2 R11.2 R12.2 R13.2 R15.2 R16.2 R20.2 R21.1 R51.2 R52.2 R53.2 R54.2 R264.1 R974.1 R975.2 R987.1 R988.2 U1.8 U2.2 U2.4(VOUT1) U3.B4 U3.B9 U3.B13 U3.D2 U3.D7 U3.D10 U3.E5 U3.F8 U3.F11 U3.G4 U3.G10 U3.H6 U3.J2 U3.J10 U3.K4 U3.L6 U3.L9 U3.N2 U3.N7 U3.N10 U3.R4 U3.R8 U4.1 U4.3 U4.9 U4.14 U4.27 U4.43 U4.49 U911.3 U911.6 U912.3 U912.6 U916.3 U916.6 Y1.4(VCC)
+5V: C18.1 C43.1 C58.1 C59.1 C640.2 C947.2 C953.1 C955.1 C961.2 C962.2 C966.2 C968.1 C969.1 F1.2 F2.1 J3.1 J3.2 L102.2 L103.2 R2.1 R306.1 R984.1 TP8.1(TP) TP47.1(TP) U2.3 U5.3 U6.3 U7.7(VCC) U911.7(VCCB) U912.7(VCCB) U913.3 U914.4 U916.7(VCCB)
GND: C1.2 C2.2 C3.2 C4.2 C5.2 C6.2 C7.2 C8.2 C9.2 C10.2 C11.2 C12.2 C13.2 C14.2 C15.2 C16.2 C17.2 C18.2 C19.2 C20.2 C21.2 C22.2 C23.2 C24.2 C25.2 C26.2 C27.2 C28.2 C29.2 C30.2 C31.2 C32.2 C33.2 C34.2 C35.2 C36.2 C37.2 C38.2 C39.2 C40.2 C41.2 C42.2 C43.2 C44.2 C45.2 C46.2 C47.2 C48.2 C49.2 C50.2 C51.2 C52.2 C53.2 C54.2 C55.2 C56.2 C57.2 C58.2 C59.2 C60.2 C639.2 C640.1 C947.1 C948.2 C949.2 C950.2 C951.2 C952.2 C953.2 C954.2 C955.2 C956.2 C957.2 C958.2 C961.1 C962.1 C963.1 C965.2 C966.1 C967.2 C968.2 C969.2 D1.2(CATHODE) D2.2(CATHODE) D3.2(CATHODE) D12.1 D13.1 D14.1 D15.1 D813.1 D814.1 D816.1 D817.1 J1.5 J1.S1 J1.S2 J1.S3 J1.S4(SHLD4) J2.1 J2.3 J2.5 J2.7 J2.9 J2.11 J2.13 J3.3 J3.4 J3.19 J3.20 J3.41 J3.42 J3.59 J3.60 J4.1 J4.2 J4.19 J4.20 J4.41 J4.42 J4.59 J4.60 J105.22 J105.26 J105.27 J106.4 R14.2 R17.1 R18.1 R264.2 R974.2 R977.1 R980.2 R982.2 R986.1 R987.2 S1.2 T1.1(PIN1) T2.1(PIN1) T3.1(PIN1) T4.1(PIN1) T5.1(PIN1) T6.1 TP10.1(TP) TP52.1(TP) U1.4 U2.1 U3.A1 U3.A16 U3.B7 U3.B11 U3.D4 U3.D13 U3.E9 U3.G2 U3.G8 U3.G15 U3.H7 U3.H9 U3.H12 U3.J5 U3.J8 U3.K7 U3.K9 U3.L2 U3.L15 U3.M8 U3.N13 U3.P3 U3.R6 U3.R10 U3.T1 U3.T16 U4.6 U4.12 U4.28 U4.41 U4.46 U4.52(VSSQ3) U4.54 U5.1 U6.1 U7.3 U911.2 U912.2 U913.1 U914.2(V-) U914.6 U915.2 U916.2 Y1.2 Y2.2
GND_FIELD SIGNAL: C934.2 C935.2 C936.2 C941.2 C942.2 C944.2 C945.2 D92.1 Q45.2(S) Q83.2(S) R326.2 R818.1 R843.2 R910.2 R916.2 R941.1 R956.2 R966.1 R970.1 TP37.1(TP) U92.2(V-) U92.6 U98.2 U910.2(V-)
GND_HVPS: C102.2 C103.2 C104.2 C205.2 C401.2 R105.2 R207.1 R302.2 R303.2 TP4.1(TP) U101.6 U101.7
GND_QUENCH: C715.2 C737.2 C738.2 C739.2 R735.2 TP34.1(TP) U75.1 U75.2
V5Q: L102.1 TP44.1(TP)
VCCIO: C3.1 C41.1 C45.1 C46.1 C47.1 C48.1 C49.1 C55.1 C56.1 R19.1 R20.1 U3.D15 U3.G13 U3.J15 U3.K13 U3.N15 U3.R13 Y2.4(VCC)
VDD5_LCD: J105.28 L103.1
VDD5_QUENCH: C934.1 C935.1 C941.1 C942.1 R960.1 R965.2 TP43.1(TP) U92.4 U910.5 U910.6
VDD33: C954.1 C956.1 C957.1 J105.24 J105.25 U913.2 U913.4(VOUT1)
A12_L62N_0: J4.57 U3.A12 U916.4
A13_L63N_0: J4.55 U3.A13
A14_L65N_0: J4.53 U3.A14
AUX_PWR_EN: R736.1 TP33.1(TP)
B12_L62P_0: J4.58 U3.B12 U916.5
B14_L65P_0: D816.2(CATHODE) J4.54 J106.2 R988.1 U3.B14
B15_L29P_1: J4.50 U3.B15
B16_L29N_1: J4.49 U3.B16
C13_L63P_0: J4.56 R989.1 U3.C13
C15_L33P_1: J4.48 U3.C15
C16_L33N_1: J4.47 U3.C16
D11_L66P_0: C958.1 D813.2(CATHODE) J4.52 R975.1 TP46.1(TP) U3.D11
D12_L66N_0: J4.51 U3.D12
D14_L31P_1: J4.36 U3.D14
D16_L31N_1: J4.35 U3.D16
DONE_2: J3.6 R13.1 U3.P13
E1_L46N_3: J3.57 U3.E1 U911.5
E2_L46P_3: J3.58 U3.E2
E3_L54N_3: J3.53 U3.E3
E4_L54P_3: J3.54 U3.E4
E15_L34P_1: C949.1 D15.2(CATHODE) J4.46 R51.1 TP28.1(TP) U3.E15
E16_L34N_1: J4.45 U3.E16
EN: R209.1 TP6.1(TP)
EN_AUX_PWR: TP48.1(TP) U916.1
EN_HVPS: TP9.1(TP) U912.1
EN_HVPS_IO: J3.25 U3.N1 U912.4
F1_L41N_GCLK26_3: J3.55 U3.F1 U911.4
F2_L41P_GCLK27_3: J3.56 U3.F2
F3_L53N_3: J3.51 U3.F3
F4_L53P_3: J3.52 U3.F4
F5_L55N_3: J3.45 U3.F5
F6_L55P_3: J3.46 U3.F6
F10_KEY_0: R21.2 S1.1 U3.F10
F13_L32P_1: J4.32 U3.F13
F14_L32N_1: J4.31 U3.F14
F15_L35P_1: J4.44 U3.F15
F16_L35N_1: J4.43 U3.F16
FPGA_TCK: J2.6 U3.C14
FPGA_TDI: J2.10 U3.C12
FPGA_TDO: J2.8 U3.E14
FPGA_TMS: J2.4 U3.A15
G1_L40N_3: J3.49 U3.G1
G3_L40P_3: J3.50 U3.G3
G5_L51N_3: J3.43 U3.G5
G6_L51P_3: J3.44 U3.G6
G12_L38P_1: C952.1 D12.2(CATHODE) J4.22 R54.1 TP45.1(TP) U3.G12
G14_L36P_1: C951.1 D13.2(CATHODE) J4.28 R53.1 TP26.1(TP) U3.G14
G16_L36N_1: J4.27 U3.G16
H1_L39N_3: J3.47 U3.H1
H2_L39P_3: J3.48 U3.H2
H3_50MHZ_CLK: R7.1 U3.H3
H4_LED_3: R1.2 U3.H4
H11_L38N_1: J4.21 U3.H11
H13_L39P_1: J4.26 U3.H13
H14_L39N_1: J4.25 U3.H14
H15_L37P_1: J4.40 U3.H15
H16_L37N_1: J4.39 U3.H16
HV+: C401.1 C602.1 D201.1(K) R305.1 TP2.1(TP)
J1_L38N_3: J3.37 U3.J1
J3_L38P_3: J3.38 U3.J3
J4_L42N_GCLK24_3: J3.39 U3.J4
J11_L40P_GCLK11_1: J4.18 J105.33 U3.J11
J12_L40N_GCLK10_1: J4.17 J105.34 U3.J12
J13_L41P_GCLK9_1: J4.16 J105.31 U3.J13
J16_RFU_CLK: R10.1 U3.J16
K1_L37N_3: J3.35 U3.K1
K2_L37P_3: J3.36 U3.K2
K3_L42P_GCLK25_3: J3.40 U3.K3
K14_L41N_GCLK8_1: J4.15 J105.32 U3.K14
K15_L44P_1: C950.1 D14.2(CATHODE) J4.38 R52.1 TP27.1(TP) U3.K15
K16_L44N_1: J4.37 U3.K16
L1_L36N_3: J3.31 U3.L1
L3_L36P_3: J3.32 U3.L3
L4_L45P_3: J3.34 U3.L4
L5_L45N_3: J3.33 U3.L5
L14_L47P_1: J4.14 J105.29 U3.L14
L16_L47N_1: J4.13 J105.30 U3.L16
M1_L35N_3: J3.27 U3.M1 U912.5
M2_L35P_3: J3.28 U3.M2
M5_L2P_3: J3.30 U3.M5
M13_L74P_1: J4.12 J105.21 U3.M13
M14_L74N_1: J4.11 J105.23 U3.M14
M15_L46P_1: J4.34 U3.M15
M16_L46N_1: J4.33 U3.M16
MSEL0: R9.1 U3.T11
MSEL1: R16.1 R17.2 U3.N11
N3_L34P_3: J3.26 U3.N3
N4_L2N_3: J3.29 U3.N4
N5_L49P_2: J3.18 J105.6 U3.N5
N12_IO_MISO2_2: R5.1 U1.3(W\P\(IO2)) U3.N12
P1_L33N_3: J3.23 J105.2 U3.P1
P2_L33P_3: J3.24 J105.1 U3.P2
P5_L49N_2: J3.17 J105.5 U3.P5
P6_L47P_2: J3.14 J105.10 U3.P6
P10_IO_DIN_MISO1_2: J3.7 U1.2 U3.P10
P12_IO_MISO3_2: R4.1 U1.7 U3.P12
P15_L48P_1: J4.30 U3.P15
P16_L48N_1: J4.29 U3.P16
PROGRAM_B_2: J3.10 R11.1 U3.T2
PULSE: R916.1 R962.1 TP38.1(TP) U92.5
PULSE_IN: TP40.1(TP) U912.8
PWR_IC: C102.1 C104.1 R206.1 TP5.1(TP) U101.2(V+)
PWR_IN: C103.1 L101.1 TP3.1(TP)
QUENCH_VOLTAGE_DOWN: R528.1 TP16.1(TP)
QUENCH_VOLTAGE_DWN_OUT: TP42.1(TP) U911.8
R1_L32N_3: J3.21 J105.4 U3.R1
R2_L32P_3: J3.22 J105.3 U3.R2
R3_IO_INIT_B_2: J3.8 R12.1 U3.R3
R5_L48P_2: J3.16 J105.8 U3.R5
R7_L32P_GCLK29_2: J3.12 J105.12 U3.R7
R9_L23P_2: J4.4 J105.18 U3.R9
R11_IO_CCLK_2: J3.5 R6.2 U1.6
R12_L52P_1: J4.6 J105.13 U3.R12
R14_L50P_1: J4.10 J105.19 U3.R14
R15_L49P_1: J4.24 U3.R15
R16_L49N_1: J4.23 U3.R16
RESET_DISCHARGE: R842.1 TP25.1(TP)
RESET_DISCHARGE_OUT: TP41.1(TP) U911.1
RXD: U3.M12 U7.9
SDRAM_A0: U3.C11 U4.23
SDRAM_A1: U3.C10 U4.24
SDRAM_A2: U3.F9 U4.25
SDRAM_A3: U3.E11 U4.26
SDRAM_A4: U3.E10 U4.29
SDRAM_A5: U3.C8 U4.30
SDRAM_A6: U3.D9 U4.31
SDRAM_A7: U3.D8 U4.32
SDRAM_A8: U3.E8 U4.33
SDRAM_A9: U3.E7 U4.34
SDRAM_A10: U3.A11 U4.22
SDRAM_A11: U3.F7 U4.35
SDRAM_A12: U3.D6 U4.36
SDRAM_BA0: U3.A10 U4.20
SDRAM_BA1: U3.B10 U4.21
SDRAM_DQ0: U3.B3 U4.2
SDRAM_DQ1: U3.A3 U4.4
SDRAM_DQ2: U3.A4 U4.5
SDRAM_DQ3: U3.B5 U4.7
SDRAM_DQ4: U3.A5 U4.8
SDRAM_DQ5: U3.B6 U4.10
SDRAM_DQ6: U3.A6 U4.11
SDRAM_DQ7: U3.C7 U4.13
SDRAM_DQ8: U3.D5 U4.42
SDRAM_DQ9: U3.C3 U4.44
SDRAM_DQ10: U3.C2 U4.45
SDRAM_DQ11: U3.D1 U4.47
SDRAM_DQ12: U3.B1 U4.48
SDRAM_DQ13: U3.C1 U4.50
SDRAM_DQ14: U3.A2 U4.51
SDRAM_DQ15: U3.B2 U4.53
SDRAM_LDQM: U3.A7 U4.15
SDRAM_NSCAS: U3.A8 U4.17
SDRAM_NSCS: U3.C9 U4.19
SDRAM_NSRAS: U3.A9 U4.18
SDRAM_NWE: U3.B8 U4.16
SDRAM_SCKE: U3.C6 U4.37
SDRAM_SCLK: U3.E6 U4.38
SDRAM_UDQM: U3.C5 U4.39
T3_CSO_B_2: R3.1 U1.1 U3.T3
T5_L48N_2: J3.15 J105.7 U3.T5
T6_L47N_2: J3.13 J105.9 U3.T6
T7_L32N_GCLK28_2: J3.11 J105.11 U3.T7
T8_IO_GCLK0_2: J3.9 U3.T8
T9_L23N_2: J4.3 J105.17 U3.T9
T10_IO_MOSI_MISO0_2: R8.2 U1.5
T12_L52N_1: J4.5 J105.14 U3.T12
T13_L51N_1: J4.7 J105.16 U3.T13
T14_L51P_1: J4.8 J105.15 U3.T14
T15_L50N_1: J4.9 J105.20 U3.T15
TXD: U3.P8 U7.8
USB_DM: J1.2 U7.2
USB_DP: J1.3 U7.1
VBIAS: R971.2 TP11.1(TP)
VQUENCH: Q89.2(S) R822.1 TP39.1(TP)
VQUENCH_PWR: C715.1 D77.1(K) R733.1 TP35.1(TP)
VREF: C936.1 R910.1 R957.2 R963.2
ZERO_CROSS: R980.1 U914.5 U916.8
N00177: Q201.1 U101.1
N00181: Q201.3(S) R105.1 U101.8
N00224: D201.2 L101.2 Q201.2
N00671: C205.1 U101.5
N03183: R206.2 R207.2 R209.2 U101.4
N10874: F1.1 J1.1
N20588: R7.2 Y1.3
N92203: R10.2 Y2.3
N141459: D2.1 R2.2
N147837: R14.1 U3.C4
N151004: R8.1 U3.T10
N151270: R6.1 U3.R11
N154888: R15.1 U3.L11
N154918: R18.2 U3.P14
N155350: D1.1 R1.1
N271586: C60.1 U7.10
N273444: R22.1 U7.6
N273448: D3.1 R22.2
N281531: C602.2 R204.1 R305.2 U101.3
N361468: R204.2 R302.1 R303.1
N365385: C737.1 C738.1 C739.1 L74.1 R740.1 R741.2 U75.5(VCC)
N365393: D77.2 L74.2 U75.6
N365573: R736.2 R740.2 U75.4
N365581: R733.2 R735.1 U75.3
N370992: D611.1(CATHODE) Q89.1 R822.2
N371048: D611.2 Q45.3
N371052: D94.2 D812.1(K) R812.2 R911.2
N371122: D812.2 Q89.3 R818.2
N371190: Q45.1 R326.1 R528.2
N371268: C930.2 D92.2(CATHODE) R911.1 R941.2
N371272: Q83.3 R812.1
N371414: Q83.1 R842.2 R843.1
N371666: C930.1 C943.2 R956.1
N372066: R957.1 R960.2 U98.1(REF) U98.3
N375383: R961.1 U92.1
N376175: R962.2 R963.1 U92.3
N379806: C944.1 R965.1 R966.2 R967.2
N380805: C943.1 R967.1 U910.3
N381019: R968.2 R969.2 U910.4
N381074: C946.2 R968.1 U910.1
N381200: C945.1 R969.1
N382559: C946.1 R961.2 R970.2
N382943: D94.1(K) R971.1
N383561: R741.1 TP32.1(TP)
N387558: R172.1 R972.1 R973.1
N387570: R172.2 R972.2 R973.2
N415847: R977.2 R979.2 T6.3
N415863: D815.2(CATHODE) R976.1 TP49.1(TP)
N415867: R976.2 T6.4
N415925: D815.1 T6.5 TP50.1(TP)
N417813: C963.2 C964.2 R979.1 R986.2
N417823: C964.1 D814.2(CATHODE) R985.1 U914.1
N419097: C965.1 R982.1 R983.2 R985.2 U914.3
N419105: R983.1 R984.2 U915.1(REF) U915.3
N427666: F2.2 TP51.1(TP)
N429095: D817.2(CATHODE) J106.3 R989.2

Pads without a net: J1 4; J2 12 14; T6 2; U3 D3 E12 E13 F12 G11 H5 J6 J14 K5 K6 K11 K12 L7 L8 L10 L12 L13 M3 M4 M6 M7 M9 M10 M11 N6 N8 N9 N14 N16 P4 P7 P9 P11 T4; U4 40; U7 4 5; Y1 1; Y2 1

## Via types
v1: diameter 0.711, hole 0.406, TOP to BOTTOM, 214 vias
v2: diameter 0.508, hole 0.305, TOP to BOTTOM, 4 vias
v3: diameter 0.457, hole 0.254, TOP to BOTTOM, 326 vias

## Routing (per net, layer and track width the routed paths; a pad name or vN(x,y) marks a point on that pad's centre or on a via; arc(x,y) is an arc through that point)
+1.2V: length 23.2
  TOP w0.406: v3(62,33.5) U3.G7 v3(63,33.5) ; v3(63,30.5) U3.G9 v3(62,31.5) U3.H8 v3(62,32.5) ; U3.K10 v3(60,30.5) U3.J9 ; v3(59,32.5) U3.K8 ; U3.J7 v3(60,33.5) ; U3.H10 v3(62,30.5)
  L3_P w0.254: v3(59,32.5) 59,31.5 v3(60,30.5) 60.14,30.5 60.75,29.89 61.39,29.89 v3(62,30.5)
  BOTTOM w0.254: C26.1 v3(60,33.5)
  BOTTOM w0.406: C20.1 v3(60,33.5) ; C28.1 v3(62,31.5) ; U3.K8 v3(59,32.5) C26.1 ; C24.1 v3(51.48,33.5) ; C22.1 v3(63,33.5) ; U3.J9 v3(60,30.5) ; C30.1 v3(63,30.5) ; U3.G9 v3(62,30.5) ; C39.1 v3(51.48,29.5) ; C32.1 v3(51.48,31.5) ; U3.G7 v3(62,32.5) ; C19.1 v3(62,33.5)
  vias: v3(30.28,29.42) v3(30.28,28.4) v3(30.28,27.39) v3(30.28,26.37)
+2.5V:
  vias: v3(30.28,21.93) v3(30.28,20.91) v3(30.28,19.89) v3(30.28,18.88) v3(47.63,24.35) v3(47.63,23.56)
+3.3V: length 88.1
  TOP w0.127: 112.8,27.1 R987.1
  TOP w0.254: C2.1 42.43,31.22 42.39,31.17 arc(42.18,31.03) R4.2 ; v1(110.7,21.1) 110.12,21.69 110.12,22.58
  TOP w0.3: U912.6 56.12,58.28 57,57.4 v1(57.6,57.4) ; U911.3 89.89,58.28 v1(89.3,57.7) ; v1(112.8,28.4) 110.9,28.4 110.12,27.62 110.12,26.98 ; U911.6 96.88,58.28 v1(96.9,58.3) ; U912.3 49.81,58.28 49.5,58.6 v1(49,58.6)
  TOP w0.406: U3.R8 v3(55,32.5) ; v3(66,33.45) 65.95,33.45 U3.D7 ; U3.F8 v3(64,31.5) ; U4.14 v3(78.72,31.5) ; U3.N2 v3(57,37.5) ; v3(66.08,29.42) U3.D10 ; R3.2 v3(42.55,43.91) ; U4.43 v3(87.63,33.1) ; U3.L9 v3(58,30.5) ; U3.R4 v3(54,36.5) ; U3.B9 v3(68,31.5) ; C2.1 v3(43.2,32.63) U1.8 ; U4.9 v3(78.72,35.5) ; U3.D2 v3(66,38.5) ; U4.3 v3(78.72,40.3) ; v3(68.44,44.15) 67.87,44.72 C1.1 Y1.4 ; v3(68,36.55) 68,36.5 U3.B4 ; U3.H6 v3(61,34.5) ; U3.N10 v3(57,29.5) ; v3(62.05,36.45) U3.G4 ; U3.N7 v3(56,33.5) ; U3.G10 v3(62,29.5) ; U3.J2 60.92,38.42 v3(60.92,38.5) ; U3.K4 v3(59,35.5) ; U4.27 v3(78.72,21.1) ; U4.49 v3(87.63,37.9) ; U3.B13 v3(67,27.5) ; U3.F11 v3(64,28.5) ; U4.1 v3(78.72,41.9) ; U3.L6 v3(58,34.5) ; R5.2 v3(39.68,43.91) ; U3.J10 v3(60,29.5) ; U3.E5 v3(65,35.5) ; R9.2 v3(49.56,28.15)
  TOP w0.508: R54.2 v1(46.9,1.9)
  TOP w0.6: R51.2 v1(79.9,1.8) ; R264.1 89,57.4 v1(89.3,57.7) ; R975.2 v1(90.9,1.7) ; v1(57.6,57.4) C639.1 ; R987.1 v1(112.8,28.4) ; R53.2 v1(57.8,1.8) ; v1(49,58.6) 48.5,58.6 48.2,58.3 C948.1 ; R988.2 v1(101.8,9.2) ; v1(96.9,58.3) 96.91,58.28 97.88,58.28 R974.1 ; v1(110.7,21.1) C967.1 ; R52.2 v1(69.1,1.7)
  BOTTOM w0.406: C7.1 v3(87.63,37.9) ; U3.L6 v3(58,34.5) ; R16.2 v3(58,30.5) C35.1 ; C8.1 61,38.58 v3(60.92,38.5) ; C54.1 v3(78.72,41.9) ; C12.1 v3(54,36.5) ; R13.2 v3(39.68,43.91) ; R21.1 v3(93.55,16.87) ; C14.1 J2.2 ; U3.N10 v3(57,29.5) ; R11.2 R12.2 43.58,33.55 arc(43.48,33.05) v3(43.2,32.63) ; C21.1 v3(56,33.5) ; C38.1 v3(60,29.5) R15.2 ; C9.1 v3(66,38.5) ; C51.1 v3(78.72,31.5) ; U3.B13 v3(67,27.5) ; C50.1 v3(78.72,21.1) ; U3.G4 v3(62.05,36.45) ; C53.1 v3(78.72,40.3) ; C16.1 v3(59,35.5) ; C15.1 v3(61,34.5) ; C31.1 v3(68,31.5) ; C27.1 v3(64,31.5) ; C52.1 v3(78.72,35.5) ; C37.1 v3(62,29.5) ; C6.1 v3(87.63,33.1)
  vias: v3(30.28,36.91) v3(30.28,35.9) v3(30.28,34.88) v3(30.28,33.86) v3(47.63,22.77) v3(47.63,21.98) v3(51.01,38.5) v3(51.01,36.5) v3(55,41.5) v3(57,41.5) v3(65,41.5) v3(67,41.5) v3(71,38.5) v3(71,36.5) v3(71,26.5) v3(71,24.5)
+5V: length 28
  TOP w0.254: U7.7 v3(40.71,23.2)
  TOP w0.3: U916.7 109.47,28.16 111,29.7 v1(111.6,29.7) C966.2 ; U911.7 95.94,58.94 v1(96.8,59.8) ; U912.7 v1(57.66,58.94)
  TOP w0.406: R2.1 v3(38.52,44.56) ; C59.1 v3(40.71,23.2)
  TOP w0.6: C640.2 57.7,58.9 v1(57.66,58.94) ; C947.2 v1(96.8,59.8)
  BOTTOM w0.508: v3(28.25,24.29) 28.25,23.63 arc(28.4,23.27) 28.76,23.12 33.91,23.12 arc(34.23,23.06) 34.5,22.88 34.72,22.65 arc(34.93,22.51) 35.18,22.46 39.48,22.46 arc(39.92,22.54) 40.3,22.78 arc(40.31,22.79) 40.32,22.81 v3(40.71,23.2)
  vias: v1(15.6,18.9) v1(15.6,17.8) v1(15.6,16.7) v1(16.1,38.9) v1(16.1,37.47) v1(16.18,58.88) v1(17,38.1) v1(17.08,59.45) v1(17.9,38.9) v1(17.9,37.47) v1(18.07,58.91) v1(18.36,59.89) v1(19.5,49.5) v1(19.5,48.3) v1(20.5,49.4) v1(20.5,48.4) v1(69.6,58.4) v1(69.6,57) v1(70.7,58.4) v1(70.7,57) v1(102.3,64.9) v1(102.3,63.9) v1(102.3,62.9) v1(103.5,64.9) v1(103.5,63.9) v1(103.5,62.9) v1(109,34.8) v3(25.2,31.78) v3(25.2,24.29) v3(25.2,16.8) v3(26.22,31.78) v3(26.22,24.29) v3(26.22,16.8) v3(27.23,31.78) v3(27.23,24.29) v3(27.23,16.8) v3(28.25,31.78) v3(28.25,16.8) v3(34.17,44.51) v3(35.19,44.51) v3(35.62,46.49) v3(35.62,45.47)
GND: length 192.3
  TOP w0.254: U7.3 v3(41.21,27.64) ; U3.E9 v3(65,31.5)
  TOP w0.3: U916.2 109.47,21.77 v1(108.9,21.2) ; U911.2 v1(91.9,58.94) ; U912.2 v1(52,58.94)
  TOP w0.406: U3.J8 v3(60,32.5) ; U3.J8 v3(61,32.5) ; U3.J8 v3(61,31.5) ; U3.J8 v3(60,31.5) ; U3.R10 v3(54,29.5) ; U3.J5 v3(60,35.5) ; v3(25.41,39.52) J1.S4 v3(23.09,39.52) ; U3.H9 v3(61,30.5) ; D2.2 v3(37.23,44.71) ; C1.2 67.06,43.72 v3(67,43.67) ; U4.46 v3(90.62,35.5) ; v3(63,32.5) U3.G8 v3(63,31.5) ; v3(30.91,39.52) J1.S2 v3(28.59,39.52) ; U3.T16 v3(53,24.5) ; U3.P3 v3(55,37.5) ; U3.R6 v3(55,33.5) ; U3.K9 v3(59,30.5) ; U3.H12 v3(61,28.5) ; U3.G2 v3(62.05,37.55) ; v3(28.74,42.42) J1.5 v3(31.36,42.42) ; U4.52 v3(87.63,40.3) ; J1.S1 v3(28.59,48.52) ; U3.D4 66,36.5 v3(66,36.55) ; S1.2 v3(97.59,16.87) ; U3.L15 v3(58,24.5) ; C3.2 61.97,16.31 v3(62.04,16.23) ; U3.D13 v3(66,26.5) ; U3.G15 v3(63,24.5) ; U3.K7 v3(59,33.5) ; Y1.2 v3(62.58,46.32) ; U3.N13 v3(56,26.5) ; v3(27.94,29.78) U5.1 v3(24.69,29.78) ; D1.2 v3(97.06,47.49) ; U3.L2 v3(58,38.5) ; U4.12 v3(78.72,33.1) ; v3(25.41,48.52) J1.S3 v3(23.09,48.52) ; v3(27.94,22.28) U6.1 v3(26.32,21.39) ; D3.2 v3(38.39,23.35) ; C60.2 v3(41.57,21.55) ; U4.28 v3(90.62,21.1) ; v3(27.94,37.27) U2.1 v3(24.69,37.27) ; C2.2 v3(43.2,30.33) ; v3(67.08,29.42) U3.B11 ; U3.B7 v3(67,32.5) ; U4.41 v3(90.62,31.5) ; U3.A1 v3(69,39.5) ; U4.54 v3(87.63,41.9) ; U3.T1 v3(53,38.5) ; U3.M8 v3(57,31.5) ; U3.A16 v3(69,23.5) ; U4.6 v3(78.72,37.9) ; C59.2 v3(40.71,20.9) ; U1.4 v3(39.39,40.3) ; U3.H7 v3(61,33.5)
  TOP w0.5: U914.2 110.25,38.15 111.2,37.2 U914.6 v1(112.3,36.3) ; R986.1 v1(112.1,45.8) ; C963.1 v1(112.1,44.3) ; R977.1 v1(112.1,47.3)
  TOP w0.508: J3.41 J3.42 ; J3.4 26.71,48.8
  TOP w0.6: D13.1 v1(61.99,1.79) ; D813.1 v1(95.19,1.81) ; C950.2 71.08,3.27 71.08,2.42 71.1,2.4 v1(71.1,1.7) ; v1(8.7,21.51) C954.2 ; C967.2 v1(109.6,18.4) ; C962.1 C961.1 v1(107.8,31) ; v1(110.47,50.6) T6.1 v1(111.5,49.36) ; C639.2 v1(61.5,57.4) ; R264.2 v1(85.4,57.4) ; D817.1 v1(111.2,7.19) ; v1(46,59.4) C948.2 ; 14.49,38.6 v1(14.49,39.9) ; C640.1 v1(61.5,58.9) ; C951.2 v1(59.9,1.8) ; R980.2 v1(113.7,32.9) ; C966.1 v1(115.5,29.7) ; U913.1 v1(18.4,31.91) 18.6,32.11 C953.2 v1(21.2,32.11) ; D816.1 v1(101.91,7.21) ; C949.2 v1(82,1.8) ; v1(99.5,57.2) R974.2 C947.1 ; D14.1 v1(73.19,1.7) ; 19.9,38.29 v1(19.9,40) ; C958.2 v1(93,1.8) ; C965.2 v1(107.7,43.9) ; 9.01,38.6 v1(9.01,39.9) ; D15.1 v1(84.09,1.8) ; D12.1 v1(50.99,1.9) ; R982.2 v1(106.1,43.9) ; R987.2 v1(115.6,27.2) ; C952.2 v1(48.9,1.9)
  L2_GND w0.254: v3(65,31.5) 64.04,32.46 63.88,32.46 ; 53.96,27.54 55,26.5 v3(56,26.5) ; 65.01,38.51 65.97,37.55 66,37.55
  L3_P w0.254: v1(2.5,82) v1(2.5,83.5) v1(2.5,85) v1(2.5,86.5) v1(2.5,88) v1(2.5,89.5) v1(2.5,91)
  BOTTOM w0.406: v3(61,28.5) C37.2 ; U3.K9 v3(59,30.5) ; v3(59,30.5) C35.2 ; v3(59,30.5) R17.1 ; C13.2 62.5,37.1 v3(62.05,37.55) ; C53.2 v3(81.04,40.3) ; C6.2 v3(85.3,33.1) ; C49.2 v3(47.9,25.5) ; C22.2 v3(63,32.5) ; C45.2 v3(66,26.5) C40.2 ; R18.1 v3(56,26.5) 56.45,26.05 C48.2 ; C16.2 v3(60,35.5) U3.J5 ; v3(57,43.67) C5.2 v3(55,43.67) ; C51.2 v3(81.04,31.5) ; C17.2 v3(30.28,32.87) ; C41.2 v3(53,24.5) ; C52.2 v3(81.04,35.5) ; C14.2 v3(94.13,19.24) ; C30.2 v3(63,31.5) ; v3(65,19.33) C55.2 v3(67,19.33) ; C8.2 v3(61,40.85) ; C20.2 v3(59,33.5) C23.2 ; C54.2 v3(81.04,41.9) ; C7.2 v3(85.3,37.9) ; U3.R6 v3(55,33.5) ; U3.H9 v3(61,30.5) C38.2 ; C24.2 v3(47.9,33.5) ; v3(30.28,25.38) C42.2 ; U3.H7 v3(61,32.5) ; R14.2 v3(73.03,36.5) C10.2 v3(73.03,38.5) ; v3(73.03,26.5) C44.2 v3(73.03,24.5) ; C26.2 v3(60,32.5) ; v3(65,43.67) C4.2 v3(67,43.67) ; U3.L15 v3(58,24.5) ; C11.2 v3(47.9,37.5) ; C36.2 v3(57,31.5) ; v3(55,19.33) C56.2 v3(57,19.33) ; v3(28.5,26.37) C43.2 ; C57.2 v3(30.28,17.89) ; C28.2 v3(61,31.5) ; C31.2 v3(70.35,31.5) ; C19.2 v3(61,33.5) ; C39.2 v3(47.9,29.5) ; v3(55,37.5) U3.P3 ; U3.J8 v3(60,31.5) ; v3(28.5,33.86) C18.2 ; C50.2 v3(81.04,21.1) ; C9.2 v3(66,36.55) ; C46.2 v3(63,24.5) ; C27.2 v3(65,31.5) ; C58.2 v3(28.5,18.88) ; C32.2 v3(47.9,31.5)
  BOTTOM w0.508: J3.41 J3.42 ; 26.71,48.87 J3.4 J3.3
  vias: v1(2.5,80.5) v1(2.5,79) v1(2.5,77.5) v1(2.5,76) v1(2.5,74.5) v1(2.5,73) v1(2.5,71.5) v1(2.5,70) v1(2.5,68.5) v1(2.5,67) v1(2.5,65.5) v1(2.5,64) v1(2.5,62.5) v1(18,22) v1(18,20.8) v1(104,37.9) v1(104,35.9) v1(114.5,42.99) v3(27.17,15.02) v3(35.45,39.3) v3(37.23,36.91) v3(37.43,27.77) v3(37.43,25.12) v3(37.38,21.44) v3(37.4,17.86) v3(61.96,19.76) v3(91.71,23.55) v3(91.73,18.93) v3(91.91,28.12) v3(91.96,33.58) v3(92.11,39.78) v3(95.52,20.88) v3(95.62,15.07)
GND_FIELD SIGNAL: length 29.2
  TOP w0.6: v1(55.7,73) C934.2 C935.2 ; R941.1 v1(62.1,80.8) ; Q45.2 85.6,82.9 85.5,82.8 R326.2 v1(85.5,80.9) ; v1(74.7,87) R843.2 72.8,87 72.7,87.1 Q83.2 ; v1(71.3,90.9) 71.7,90.5 R818.1 ; v1(65.64,71.94) 64.41,71.94 U92.2 ; C936.2 v1(64.7,79.1) ; R970.1 v1(71.6,75.9) ; R956.2 v1(74.14,82) ; v1(74.4,74.8) 74.65,75.05 U910.2 ; R916.2 v1(60.1,69) ; R910.2 v1(58.4,81.3) ; U98.2 v1(61.11,75.88) ; C945.2 v1(79.88,72.8) ; R966.1 v1(69.9,76.1) ; C941.2 v1(83.51,77.3) ; C942.2 v1(83.51,75.8) ; D92.1 v1(66.4,85.8) ; C944.2 v1(74.2,77.3) ; U92.6 v1(60.1,71)
GND_HVPS:
  vias: v1(13.1,71.18) v1(14.04,71.16) v1(14.23,71.98) v1(16.1,79.9) v1(16.1,77.8) v1(16.8,78.9) v1(17.4,79.9) v1(17.5,77.8) v1(18.2,78.9) v1(18.9,79.9) v1(19,77.8) v1(19.7,78.9) v1(20.1,80.1) v1(21.4,80.2) v1(21.65,68.08) v1(21.74,69.53) v1(22.41,68.81) v1(23.15,69.56) v1(23.15,68.1) v1(30.4,75.9) v1(33.6,81.5) v1(33.6,80.3) v1(33.6,79.1) v1(34.7,77.6) v1(34.9,81.5) v1(34.9,80.3) v1(34.9,79.1) v1(36.1,81.5) v1(36.1,80.3) v1(36.1,79.1) v2(37.3,73.3) v2(37.3,72.4) v2(38,73.3) v2(38,72.4)
GND_QUENCH:
  vias: v1(91.6,82.4) v1(91.6,80.9) v1(92.7,82.4) v1(92.7,80.9) v1(93.9,82.4) v1(93.9,80.9) v1(94.8,80.2) v1(95.1,81.3) v1(95.3,79.3) v1(101.8,84.1) v1(101.78,82.8) v1(101.8,81.6) v1(103,84.1) v1(103,82.8) v1(103,81.6) v1(104.4,82.2) v1(112.4,70.7) v1(112.9,68.3) v1(113.5,70.7) v1(113.6,69.3) v1(114.4,77.7) v1(114.4,76.4) v1(114.4,74.3) v1(114.4,73.2) v1(114.7,70.7) v1(114.8,69.3) v1(115,75.4) v1(115.3,68.2) v1(115.7,82.2) v1(115.7,81.2) v1(115.7,80.2) v1(115.7,79) v1(115.7,77.7) v1(115.7,76.4) v1(115.7,74.3) v1(115.7,73.2) v1(115.8,70.7)
VCCIO: length 9.4
  TOP w0.406: U3.N15 v3(56,24.5) ; U3.D15 v3(66,24.5) ; U3.R13 v3(54,26.5) ; U3.G13 v3(63,26.5) ; v3(60.36,17.56) C3.1 ; U3.K13 v3(59,26.5) ; U3.J15 v3(60,24.5)
  BOTTOM w0.406: C45.1 v3(66,24.5) ; C48.1 56.45,24.95 v3(56,24.5) ; C46.1 v3(63,26.5) ; C47.1 v3(59,26.5) ; C41.1 53.71,26.21 v3(54,26.5)
  vias: v3(51.01,25.5) v3(51.01,24.5) v3(51.01,23.5) v3(55,21.5) v3(57,21.5) v3(65,21.5) v3(67,21.5)
VDD5_LCD:
  vias: v1(7.77,19.1) v1(7.78,17.55) v1(8.37,18.31) v1(8.96,19.06) v1(9.02,17.54)
VDD5_QUENCH: length 2.3
  TOP w0.6: R965.2 v1(67.1,77.2) ; R960.1 v1(54.7,74)
  vias: v1(59.5,73.4) v1(60.3,73) v1(78.33,77.41) v1(79.1,77.07) v1(79.86,77.38) v1(79.88,75.93)
VDD33:
  vias: v1(7.84,34.49) v1(7.8,23.9) v1(8.1,31.6) v1(8.4,23.1) v1(8.73,33.79) v1(8.9,23.9) v1(9.4,31.6) v1(10.8,31.6)
A12_L62N_0: length 68.6
  TOP w0.127: U916.4 110.77,24.49 110.89,24.61 111.69,24.61 112.6,23.7 112.6,17.6 110.5,15.5 103.6,15.5 99.4,11.3 96.7,11.3 95.55,12.45 J4.57 95.29,11.47 arc(95.25,11.38) 95.16,11.34 94.82,11.34 arc(94.34,11.54) 94.15,12.01 94.15,12.71 94.15,12.71 arc(94.14,12.73) 94.14,12.75 arc(94.02,13.05) 93.82,13.31 93.47,13.66 arc(93.42,13.79) 93.47,13.93 93.48,13.93 arc(93.63,14.3) 93.48,14.67 arc(93.11,14.82) 92.74,14.67 92.73,14.66 arc(92.6,14.61) 92.47,14.66 88.22,18.91 arc(86.88,19.81) 85.3,20.12 80.02,20.12 arc(79.89,20.18) 79.83,20.31 79.83,20.46 arc(79.64,20.65) 79.45,20.46 79.45,20.31 arc(79.39,20.18) 79.26,20.12 78.06,20.12 arc(76.57,20.42) 75.3,21.26 75.12,21.44 arc(75.07,21.58) 75.12,21.71 arc(75.18,21.84) 75.12,21.98 75.12,21.98 arc(74.98,22.03) 74.85,21.98 74.85,21.98 arc(74.72,21.92) 74.58,21.98 72.86,23.7 arc(72.15,24.77) 71.9,26.03 71.9,26.29 arc(71.82,26.68) 71.6,27 71.3,27.31 arc(70.73,27.68) 70.07,27.82 68.94,27.82 arc(68.7,27.86) U3.A12
A13_L63N_0: length 37.9
  TOP w0.127: U3.A13 68.55,26.95 arc(68.69,26.86) 68.85,26.83 69.93,26.83 arc(70.39,26.64) 70.58,26.18 70.58,24.31 arc(70.61,24.15) 70.7,24.01 71.18,23.53 arc(71.32,23.47) 71.45,23.53 71.54,23.61 arc(71.81,23.61) 71.81,23.35 71.72,23.26 arc(71.72,22.99) 71.99,22.99 72.08,23.08 arc(72.35,23.08) 72.35,22.81 72.26,22.72 arc(72.26,22.45) 72.53,22.45 72.62,22.54 arc(72.88,22.54) 72.88,22.27 72.8,22.18 arc(72.74,22.05) 72.8,21.91 75.08,19.63 arc(75.6,19.28) 76.22,19.16 85.5,19.16 arc(86.72,18.91) 87.75,18.22 89.27,16.71 arc(89.76,15.97) 89.93,15.1 89.93,14.23 arc(90.04,13.96) 90.31,13.85 arc(90.4,13.88) 90.44,13.97 arc(90.57,14.3) 90.9,14.43 arc(91.51,14.18) 91.76,13.57 91.76,11.47 arc(91.8,11.38) 91.89,11.34 92.62,11.34 arc(92.71,11.38) 92.75,11.47 J4.55
A14_L65N_0: length 37.9
  TOP w0.127: J4.53 90.21,11.47 arc(90.17,11.38) 90.08,11.34 89.22,11.34 arc(89.13,11.38) 89.09,11.47 89.09,13.52 arc(88.94,13.88) 88.57,14.04 87.81,14.04 arc(87.62,14.23) 87.81,14.42 88.57,14.42 arc(88.94,14.57) 89.09,14.94 89.09,15.19 arc(89.01,15.62) 88.77,15.97 86.82,17.92 arc(86.58,18.08) 86.3,18.14 74.79,18.14 arc(74.54,18.19) 74.33,18.33 73.96,18.7 arc(73.9,18.84) 73.96,18.97 74,19.01 arc(74.15,19.38) 74,19.75 arc(73.63,19.9) 73.26,19.75 73.22,19.71 arc(72.95,19.71) 72.95,19.98 72.99,20.02 arc(73.14,20.39) 72.99,20.76 arc(72.62,20.91) 72.25,20.76 72.21,20.72 arc(72.08,20.66) 71.95,20.72 71.37,21.29 arc(71.32,21.42) 71.38,21.55 71.42,21.6 arc(71.42,21.86) 71.15,21.86 71.11,21.82 arc(70.84,21.82) 70.84,22.09 70.88,22.13 arc(70.88,22.4) 70.61,22.4 70.57,22.36 arc(70.44,22.31) 70.3,22.36 69.92,22.74 arc(69.8,22.92) 69.76,23.12 69.76,25.35 arc(69.63,25.68) 69.31,25.81 68.85,25.81 arc(68.7,25.84) 68.58,25.92 U3.A14
B12_L62P_0: length 69.6
  TOP w0.127: U916.5 110.77,25.07 110.89,24.95 111.82,24.95 112.93,23.84 112.93,17.46 110.64,15.17 103.74,15.17 99.54,10.97 96.7,10.97 95.64,9.91 J4.58 95.29,10.89 arc(95.25,10.98) 95.16,11.01 94.82,11.01 arc(94.11,11.31) 93.82,12.01 93.82,12.67 arc(93.73,12.89) 93.59,13.07 93.24,13.43 arc(93.09,13.79) 93.24,14.16 93.24,14.17 arc(93.3,14.3) 93.24,14.44 93.24,14.44 arc(93.1,14.49) 92.97,14.44 92.97,14.43 arc(92.6,14.28) 92.23,14.43 87.99,18.68 arc(86.75,19.5) 85.3,19.79 78.06,19.79 arc(76.44,20.11) 75.07,21.03 72.63,23.47 arc(71.84,24.64) 71.57,26.03 71.57,26.29 arc(71.51,26.55) 71.37,26.77 71.07,27.07 arc(70.61,27.38) 70.07,27.49 68.74,27.49 arc(68.07,27.62) U3.B12
B14_L65P_0: length 60.8
  TOP w0.127: R988.1 105.2,9.4 104.3,10.3 101.4,10.3 98.8,7.7 92.1,7.7 90.21,9.59 J4.54 90.21,10.89 arc(90.17,10.98) 90.08,11.01 89.22,11.01 arc(88.9,11.15) 88.76,11.47 88.76,13.52 arc(88.71,13.65) 88.57,13.71 87.81,13.71 arc(87.29,14.23) 87.81,14.75 88.57,14.75 arc(88.71,14.8) 88.76,14.94 88.76,15.19 arc(88.7,15.49) 88.54,15.74 86.58,17.69 arc(86.45,17.78) 86.3,17.81 74.79,17.81 arc(74.42,17.88) 74.1,18.1 73.72,18.47 arc(73.57,18.84) 73.72,19.21 73.76,19.25 arc(73.82,19.38) 73.77,19.51 73.76,19.52 arc(73.63,19.57) 73.49,19.52 73.45,19.48 arc(72.72,19.48) 72.72,20.21 72.76,20.25 arc(72.81,20.38) 72.76,20.52 72.76,20.52 arc(72.62,20.58) 72.49,20.52 72.45,20.48 arc(72.08,20.33) 71.71,20.48 69.69,22.51 arc(69.5,22.79) 69.43,23.12 69.43,25.35 arc(69.4,25.44) 69.31,25.48 68.75,25.48 arc(68.08,25.62) U3.B14
  TOP w0.4: R988.1 105.2,7.48 arc(105.23,7.33) D816.2 105.31,4.17 arc(105.32,4.13) J106.2
